# EAGLE board panelized_oshpark_femtoBeacon_r2.0.0 (EAGLE 7.5.0), part 1 of 3
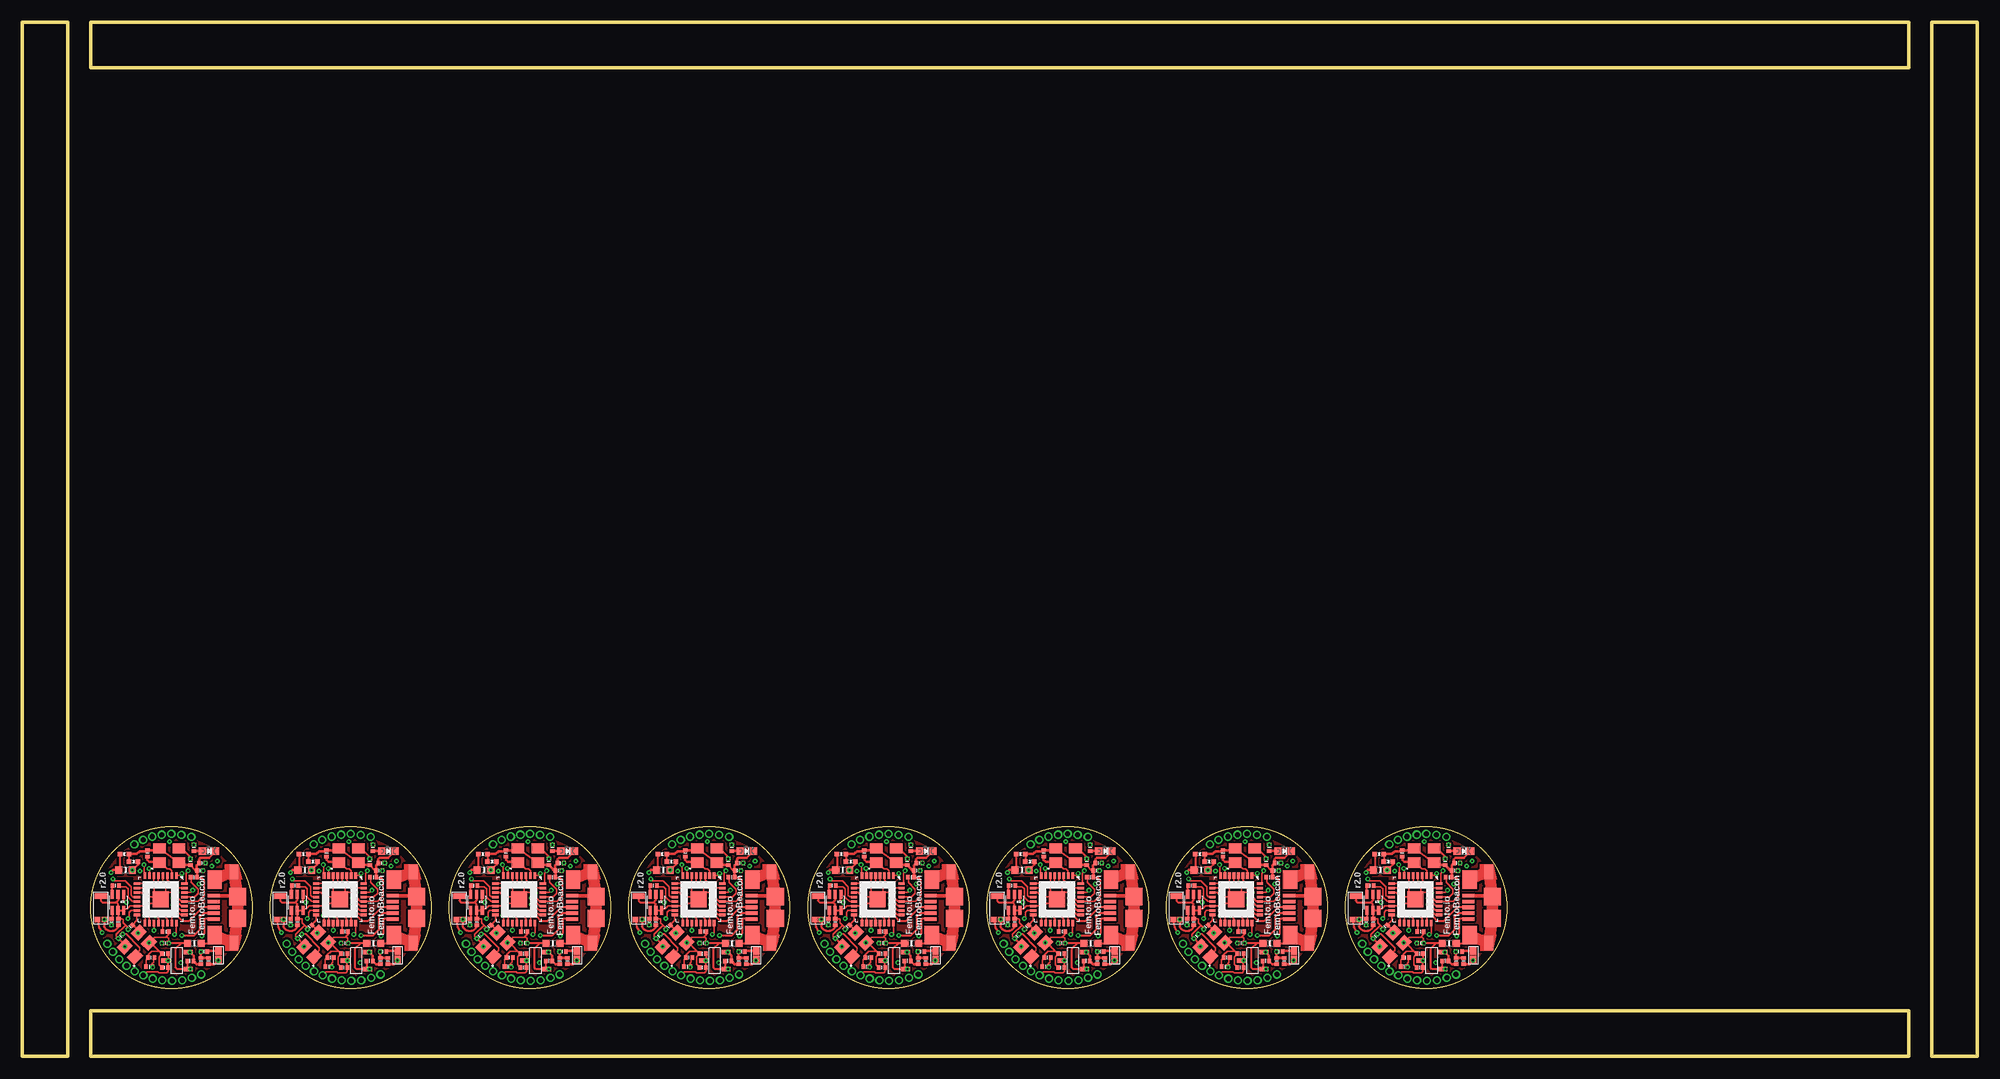
[diagram p0: board, top side]
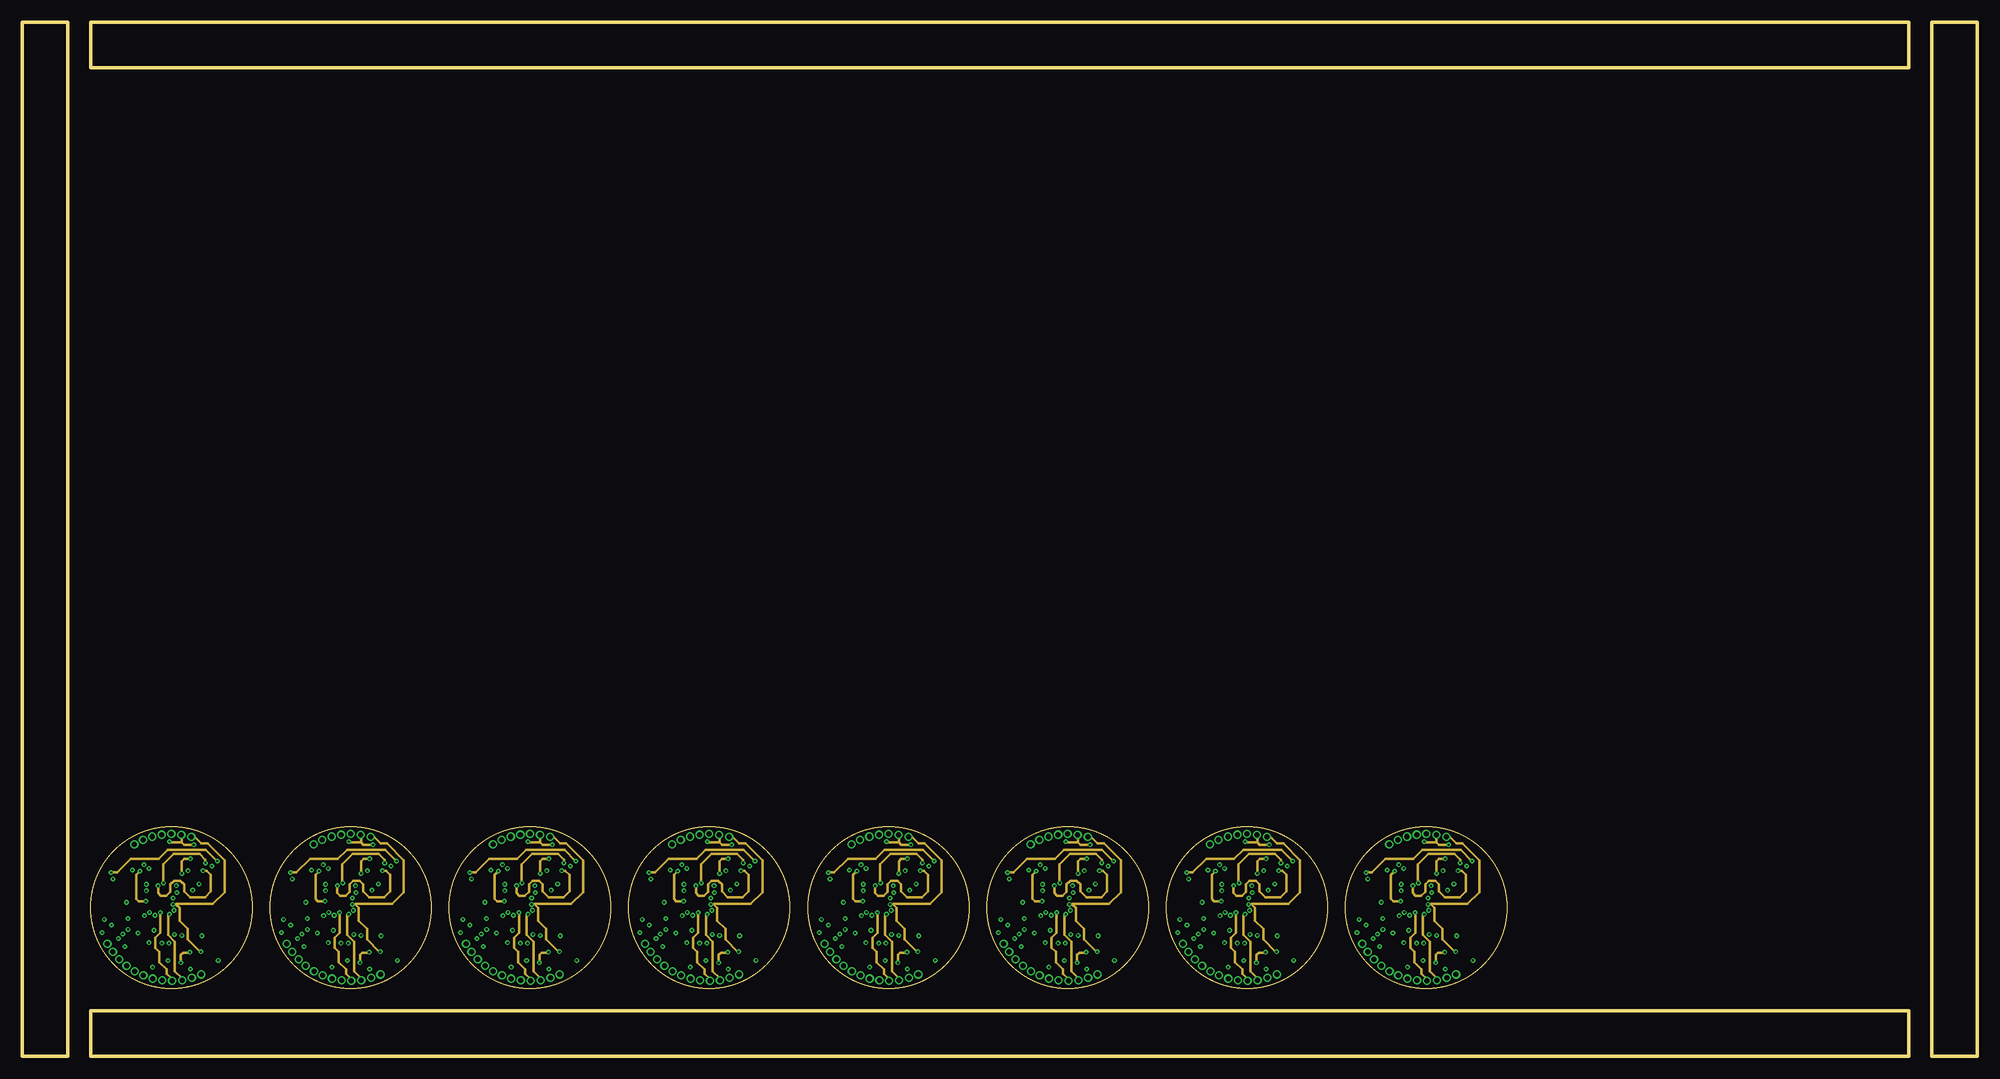
[diagram p1: board, inner layer Route2]
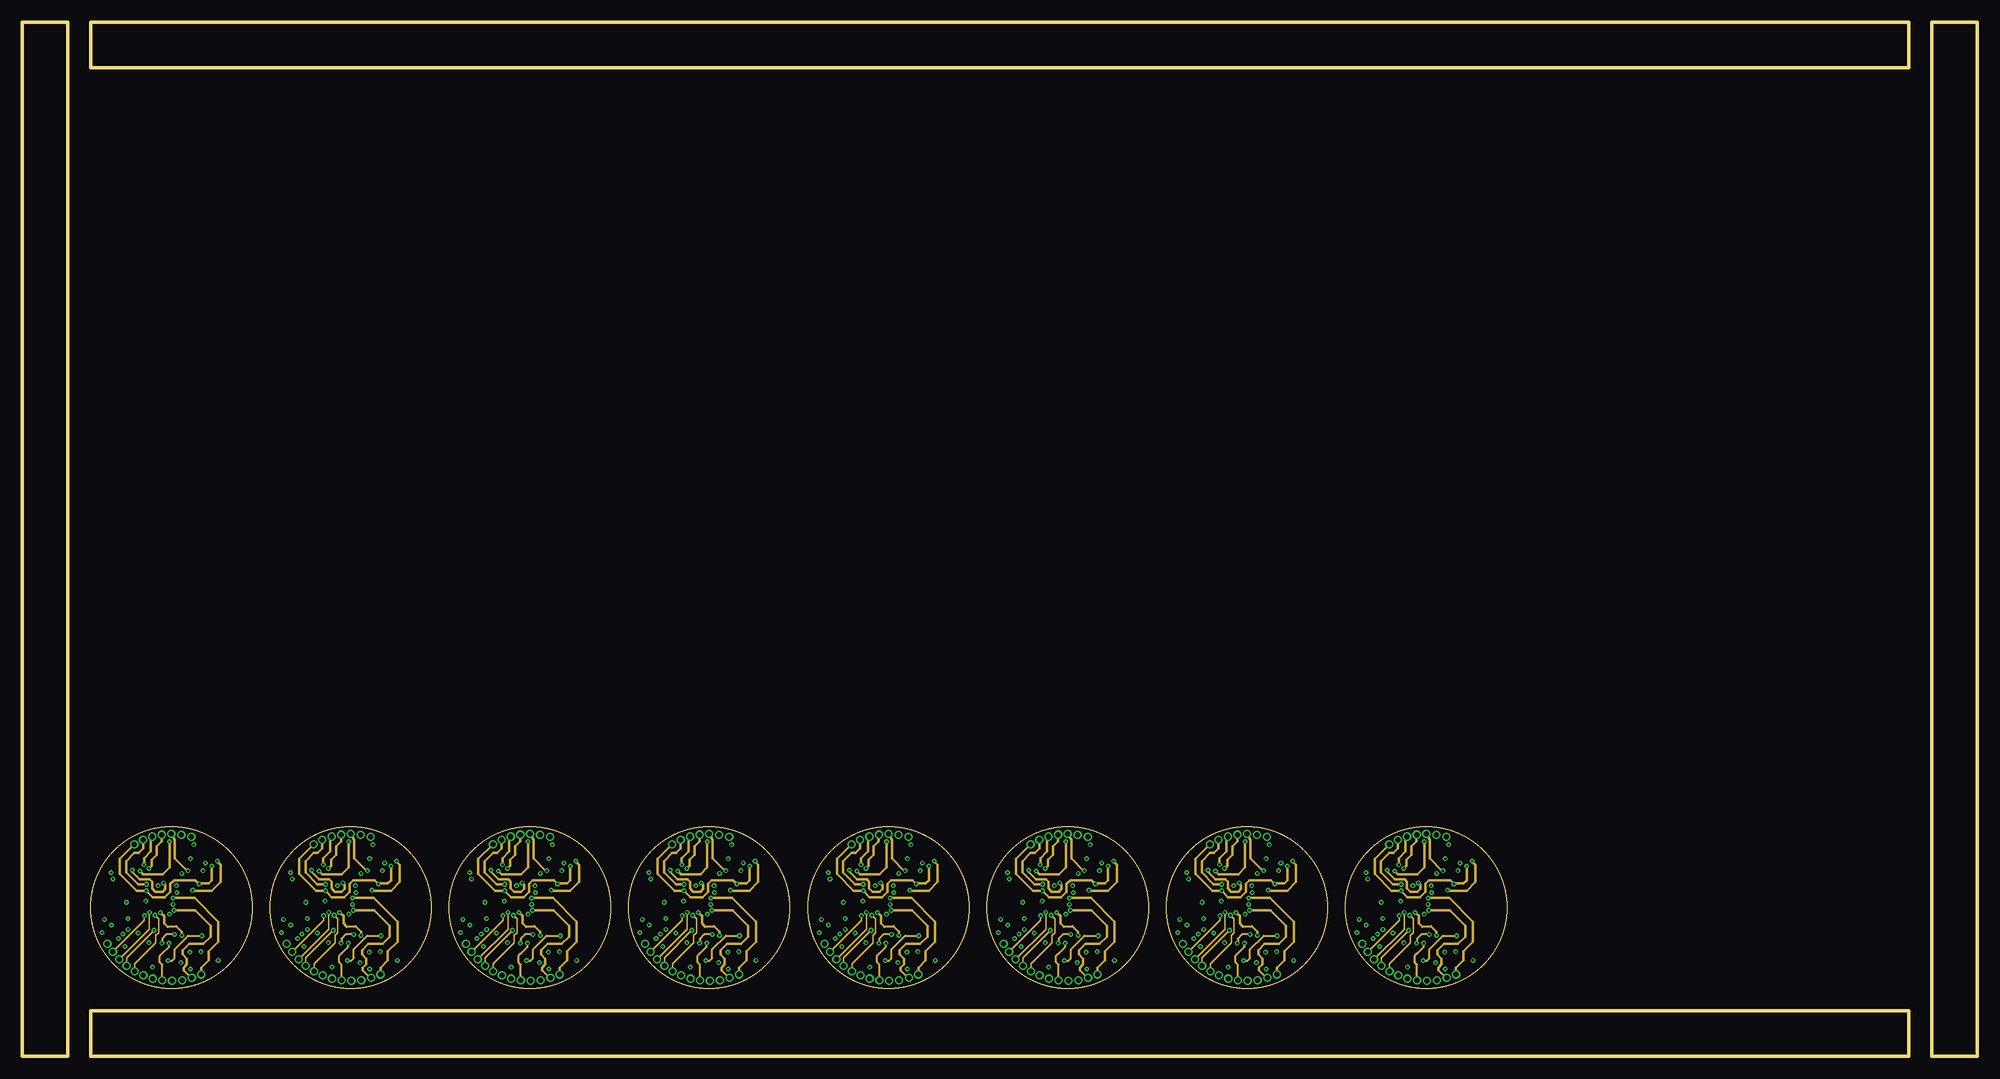
[diagram p2: board, inner layer Route15]
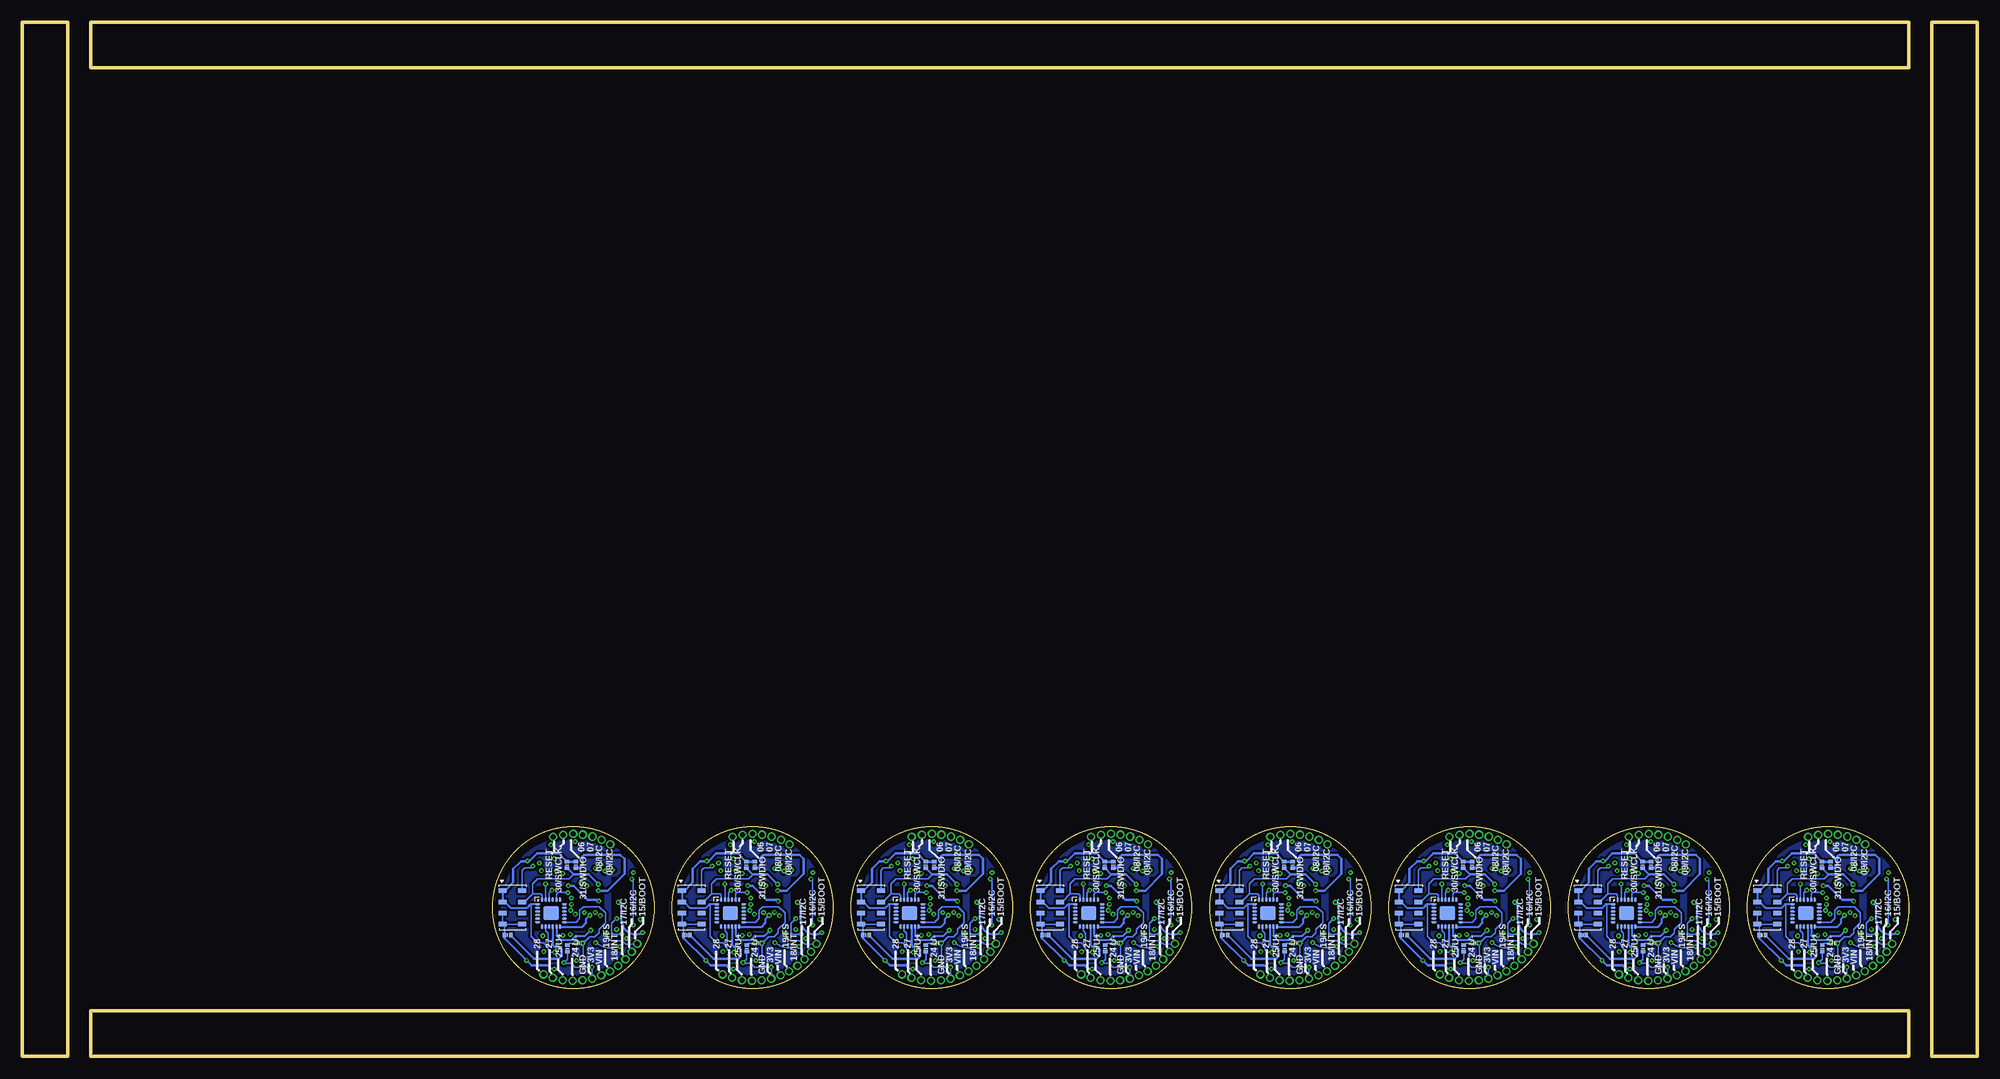
[diagram p3: board, bottom side, seen from below]

Size 218.08 x 115.39 mm. Coordinates in mm from the lower left corner, seen from the top.
Outline: 5.08,0 0,0 0,115.39 5.08,115.39 5.08,0
Outline: 7.62,5.08 7.62,0 210.46,0 210.46,5.08 7.62,5.08
Outline: 218.08,0 213,0 213,115.39 218.08,115.39 218.08,0
Outline: 7.62,115.39 7.62,110.31 210.46,110.31 210.46,115.39 7.62,115.39
Outline: circle at 16.62,16.62 radius 9
Outline: circle at 36.62,16.62 radius 9
Outline: circle at 56.62,16.62 radius 9
Outline: circle at 76.62,16.62 radius 9
Outline: circle at 96.62,16.62 radius 9
Outline: circle at 116.62,16.62 radius 9
Outline: circle at 136.62,16.62 radius 9
Outline: circle at 156.62,16.62 radius 9
Copper layers (1+2*15+16): Top 0.035mm / dielectric 0.7mm / Route2 0.035mm / dielectric 0.15mm / Route15 0.035mm / dielectric 0.2mm / Bottom 0.035mm
Design rules "AQS_custom_4layer": minimum track width 5mil, minimum drill 5mil, track to track 6mil, track to pad 6mil, pad to pad 6mil, via to via 6mil, smd to smd 1mil, copper to edge 15mil, drill to drill 6mil, minimum pad ring 7mil, minimum via ring 3mil, stop-mask expansion 2mil, vias tented up to drill 10mil, thermal gap 10mil

## Footprints (pad centres in the part's own frame; a part is rotated, then mirrored left to right if it is on the bottom)
ANT_BAR = smd 0.62 x 0.61: 1 -1.3,0.37; 2 -1.3,-0.38 | smd 0.62 x 1.36: 3 1.3,0
SPST_SMD = smd 0.889 x 0.699: 1 -0.508,0; 2 0.508,0
PART = smd 0.4 x 0.5: 1 -0.35,0; 2 0.35,0
_0402MP = smd 0.5 x 0.5: 1 -0.508,0; 2 0.508,0
_0603MP = smd 0.8 x 0.8: 1 -0.762,0; 2 0.762,0
MCP1700T-3302E/TT = smd 0.5 x 1: GND -0.95,-1.25; VIN 0,1.25; VOUT 0.95,-1.25
CHIPLED_0603_NOOUTLINE = smd 0.8 x 0.8: A 0,-0.75; C 0,0.75
TSX-3225 = smd 1.4 x 1.15: 1 -1.1,-0.8; 2 1.1,-0.8; 3 1.1,0.8; 4 -1.1,0.8
1X1_ROUND = drill 0.559 pad 0.864: P$1 0,0
QFN_3X3MM = smd 0.6 x 0.25: P$1 -1.5,1; P$2 -1.5,0.6; P$3 -1.5,0.2; P$4 -1.5,-0.2; P$5 -1.5,-0.6; P$6 -1.5,-1; P$13 1.5,-1; P$14 1.5,-0.6; P$15 1.5,-0.2; P$16 1.5,0.2; P$17 1.5,0.6; P$18 1.5,1 | smd 0.25 x 0.6: P$7 -1,-1.5; P$8 -0.6,-1.5; P$9 -0.2,-1.5; P$10 0.2,-1.5; P$11 0.6,-1.5; P$12 1,-1.5; P$19 1,1.5; P$20 0.6,1.5; P$21 0.2,1.5; P$22 -0.2,1.5; P$23 -0.6,1.5; P$24 -1,1.5 | smd 1.7 x 1.54: P$25 0,0
0805_BALUN = smd 1 x 0.35: 1 -0.9,0.65; 2 -0.9,0; 3 -0.9,-0.65; 4 0.9,-0.65; 5 0.9,0; 6 0.9,0.65
MS5611-01BA03 = smd 0.9 x 0.5: 1 -1.1,1.875; 2 -1.1,0.625; 3 -1.1,-0.625; 4 -1.1,-1.875; 5 1.1,-1.875; 6 1.1,-0.625; 7 1.1,0.625; 8 1.1,1.875
QFN32 = smd 0.7 x 0.3: 1 -2.65,1.75; 2 -2.65,1.25; 3 -2.65,0.75; 4 -2.65,0.25; 5 -2.65,-0.25; 6 -2.65,-0.75; 7 -2.65,-1.25; 8 -2.65,-1.75; 17 2.65,-1.75; 18 2.65,-1.25; 19 2.65,-0.75; 20 2.65,-0.25; 21 2.65,0.25; 22 2.65,0.75; 23 2.65,1.25; 24 2.65,1.75 | smd 0.3 x 0.7: 9 -1.75,-2.65; 10 -1.25,-2.65; 11 -0.75,-2.65; 12 -0.25,-2.65; 13 0.25,-2.65; 14 0.75,-2.65; 15 1.25,-2.65; 16 1.75,-2.65; 25 1.75,2.65; 26 1.25,2.65; 27 0.75,2.65; 28 0.25,2.65; 29 -0.25,2.65; 30 -0.75,2.65; 31 -1.25,2.65; 32 -1.75,2.65 | smd 1.8 x 1.8: 33 0,0
USB_MICROB_PACKAGE = smd 0.4 x 1.35: 1 -1.3,1.47; 2 -0.64,1.47; 3 0,1.47; 4 0.66,1.47; 5 1.3,1.47 | smd 2.1 x 1.6: 6 -3.1,1.35; 11 3.1,1.35 | smd 1.6 x 1: 7 -4,-0.8; 10 4,-0.8 | smd 1.9 x 1.9: 8 -1.2,-1.2; 9 1.2,-1.2

## Placement (x,y rotation side)
ANT1  PULSE_ANT_2.4GHZ  [ANT_BAR]  8.76,16.59 90 top
ANT2  PULSE_ANT_2.4GHZ  [ANT_BAR]  28.76,16.59 90 top
ANT3  PULSE_ANT_2.4GHZ  [ANT_BAR]  48.76,16.59 90 top
ANT4  PULSE_ANT_2.4GHZ  [ANT_BAR]  68.76,16.59 90 top
ANT5  PULSE_ANT_2.4GHZ  [ANT_BAR]  88.76,16.59 90 top
ANT6  PULSE_ANT_2.4GHZ  [ANT_BAR]  108.76,16.59 90 top
ANT7  PULSE_ANT_2.4GHZ  [ANT_BAR]  128.76,16.59 90 top
ANT8  PULSE_ANT_2.4GHZ  [ANT_BAR]  148.76,16.59 90 top
BTN  DNP  [SPST_SMD]  21.87,11.28 270 top
BTN1  DNP  [SPST_SMD]  41.87,11.28 270 top
BTN2  DNP  [SPST_SMD]  61.87,11.28 270 top
BTN3  DNP  [SPST_SMD]  81.87,11.28 270 top
BTN4  DNP  [SPST_SMD]  101.87,11.28 270 top
BTN5  DNP  [SPST_SMD]  121.87,11.28 270 top
BTN6  DNP  [SPST_SMD]  141.87,11.28 270 top
BTN7  DNP  [SPST_SMD]  161.87,11.28 270 top
C1  0.1uF  [PART]  20.78,10.64 270 top
C2  0.1uF  [PART]  15.98,13.94 0 top
C3  10pF  [PART]  10.95,13.41 45 top
C4  10pF  [PART]  12.04,14.43 225 top
C5  2.2uF  [PART]  18.75,10.67 180 top
C6  2.2uF  [PART]  15.9,11.45 180 top
C7  0.47uF  [PART]  15.9,9.93 180 top
C8  0.1uF  [PART]  20.07,21.59 180 top
C9  0.1uF  [PART]  19.13,19.99 0 top
C10  0.1uF  [PART]  14.38,11.02 180 top
C11  22pF, C0G, 5%  [PART]  10.41,19.05 180 top
C12  22pF, C0G, 5%  [PART]  9.93,15.01 90 top
C13  DNP  [PART]  10.69,15.01 90 top
C14  9pF  [PART]  13.94,22.66 270 top
C15  9pF  [PART]  18.75,21.72 270 top
C16  0.1uF  [PART]  15.95,12.64 0 top
C17  0.1uF  [PART]  19.81,20.73 180 top
C18  0.1uF  [PART]  40.78,10.64 270 top
C19  0.1uF  [PART]  35.98,13.94 0 top
C20  2.2uF  [PART]  38.75,10.67 180 top
C21  10uF  [_0402MP]  11.38,22.58 180 top
C22  10uF  [_0402MP]  12.4,21.74 0 top
C23  2.2uF  [PART]  35.9,11.45 180 top
C24  0.47uF  [PART]  35.9,9.93 180 top
C25  0.1uF  [PART]  37.27,12.07 90 bottom
C26  0.1uF  [PART]  40.07,21.59 180 top
C27  0.1uF  [PART]  39.13,19.99 0 top
C28  0.1uF  [PART]  35.95,12.64 0 top
C29  0.1uF  [PART]  17.27,12.07 90 bottom
C30  0.1uF  [PART]  15.95,12.64 0 bottom
C31  10nF  [PART]  14.15,10.01 0 top
C32  0.1uF  [PART]  23.95,13.54 180 bottom
C33  0.1uF  [PART]  39.81,20.73 180 top
C34  10uF  [_0402MP]  31.38,22.58 180 top
C35  10uF  [_0402MP]  32.4,21.74 0 top
C36  0.1uF  [PART]  34.38,11.02 180 top
C37  10pF  [PART]  30.95,13.41 45 top
C38  10pF  [PART]  32.04,14.43 225 top
C39  22pF, C0G, 5%  [PART]  30.41,19.05 180 top
C40  22pF, C0G, 5%  [PART]  29.93,15.01 90 top
C41  DNP  [PART]  30.69,15.01 90 top
C42  9pF  [PART]  33.94,22.66 270 top
C43  9pF  [PART]  38.75,21.72 270 top
C44  10nF  [PART]  34.15,10.01 0 top
C45  0.1uF  [PART]  35.95,12.64 0 bottom
C46  0.1uF  [PART]  43.95,13.54 180 bottom
C47  0.1uF  [PART]  60.78,10.64 270 top
C48  0.1uF  [PART]  55.98,13.94 0 top
C49  2.2uF  [PART]  58.75,10.67 180 top
C50  2.2uF  [PART]  55.9,11.45 180 top
C51  0.47uF  [PART]  55.9,9.93 180 top
C52  0.1uF  [PART]  57.27,12.07 90 bottom
C53  0.1uF  [PART]  60.07,21.59 180 top
C54  0.1uF  [PART]  59.13,19.99 0 top
C55  0.1uF  [PART]  55.95,12.64 0 top
C56  0.1uF  [PART]  59.81,20.73 180 top
C57  10uF  [_0402MP]  51.38,22.58 180 top
C58  10uF  [_0402MP]  52.4,21.74 0 top
C59  0.1uF  [PART]  54.38,11.02 180 top
C60  10pF  [PART]  50.95,13.41 45 top
C61  10pF  [PART]  52.04,14.43 225 top
C62  22pF, C0G, 5%  [PART]  50.41,19.05 180 top
C63  22pF, C0G, 5%  [PART]  49.93,15.01 90 top
C64  DNP  [PART]  50.69,15.01 90 top
C65  9pF  [PART]  53.94,22.66 270 top
C66  9pF  [PART]  58.75,21.72 270 top
C67  10nF  [PART]  54.15,10.01 0 top
C68  0.1uF  [PART]  55.95,12.64 0 bottom
C69  0.1uF  [PART]  63.95,13.54 180 bottom
C70  0.1uF  [PART]  80.78,10.64 270 top
C71  0.1uF  [PART]  75.98,13.94 0 top
C72  2.2uF  [PART]  78.75,10.67 180 top
C73  2.2uF  [PART]  75.9,11.45 180 top
C74  0.47uF  [PART]  75.9,9.93 180 top
C75  0.1uF  [PART]  77.27,12.07 90 bottom
C76  0.1uF  [PART]  80.07,21.59 180 top
C77  0.1uF  [PART]  79.13,19.99 0 top
C78  0.1uF  [PART]  75.95,12.64 0 top
C79  0.1uF  [PART]  79.81,20.73 180 top
C80  10uF  [_0402MP]  71.38,22.58 180 top
C81  10uF  [_0402MP]  72.4,21.74 0 top
C82  0.1uF  [PART]  74.38,11.02 180 top
C83  10pF  [PART]  70.95,13.41 45 top
C84  10pF  [PART]  72.04,14.43 225 top
C85  22pF, C0G, 5%  [PART]  70.41,19.05 180 top
C86  22pF, C0G, 5%  [PART]  69.93,15.01 90 top
C87  DNP  [PART]  70.69,15.01 90 top
C88  9pF  [PART]  73.94,22.66 270 top
C89  9pF  [PART]  78.75,21.72 270 top
C90  10nF  [PART]  74.15,10.01 0 top
C91  0.1uF  [PART]  75.95,12.64 0 bottom
C92  0.1uF  [PART]  83.95,13.54 180 bottom
C93  0.1uF  [PART]  100.78,10.64 270 top
C94  0.1uF  [PART]  95.98,13.94 0 top
C95  2.2uF  [PART]  98.75,10.67 180 top
C96  2.2uF  [PART]  95.9,11.45 180 top
C97  0.47uF  [PART]  95.9,9.93 180 top
C98  0.1uF  [PART]  97.27,12.07 90 bottom
C99  0.1uF  [PART]  100.07,21.59 180 top
C100  0.1uF  [PART]  99.13,19.99 0 top
C101  0.1uF  [PART]  95.95,12.64 0 top
C102  0.1uF  [PART]  99.81,20.73 180 top
C103  10uF  [_0402MP]  91.38,22.58 180 top
C104  10uF  [_0402MP]  92.4,21.74 0 top
C105  0.1uF  [PART]  94.38,11.02 180 top
C106  10pF  [PART]  90.95,13.41 45 top
C107  10pF  [PART]  92.04,14.43 225 top
C108  22pF, C0G, 5%  [PART]  90.41,19.05 180 top
C109  22pF, C0G, 5%  [PART]  89.93,15.01 90 top
C110  DNP  [PART]  90.69,15.01 90 top
C111  9pF  [PART]  93.94,22.66 270 top
C112  9pF  [PART]  98.75,21.72 270 top
C113  10nF  [PART]  94.15,10.01 0 top
C114  0.1uF  [PART]  95.95,12.64 0 bottom
C115  0.1uF  [PART]  103.95,13.54 180 bottom
C116  0.1uF  [PART]  120.78,10.64 270 top
C117  0.1uF  [PART]  115.98,13.94 0 top
C118  2.2uF  [PART]  118.75,10.67 180 top
C119  2.2uF  [PART]  115.9,11.45 180 top
C120  0.47uF  [PART]  115.9,9.93 180 top
C121  0.1uF  [PART]  117.27,12.07 90 bottom
C122  0.1uF  [PART]  120.07,21.59 180 top
C123  0.1uF  [PART]  119.13,19.99 0 top
C124  0.1uF  [PART]  115.95,12.64 0 top
C125  0.1uF  [PART]  119.81,20.73 180 top
C126  10uF  [_0402MP]  111.38,22.58 180 top
C127  10uF  [_0402MP]  112.4,21.74 0 top
C128  0.1uF  [PART]  114.38,11.02 180 top
C129  10pF  [PART]  110.95,13.41 45 top
C130  10pF  [PART]  112.04,14.43 225 top
C131  22pF, C0G, 5%  [PART]  110.41,19.05 180 top
C132  22pF, C0G, 5%  [PART]  109.93,15.01 90 top
C133  DNP  [PART]  110.69,15.01 90 top
C134  9pF  [PART]  113.94,22.66 270 top
C135  9pF  [PART]  118.75,21.72 270 top
C136  10nF  [PART]  114.15,10.01 0 top
C137  0.1uF  [PART]  115.95,12.64 0 bottom
C138  0.1uF  [PART]  123.95,13.54 180 bottom
C139  0.1uF  [PART]  140.78,10.64 270 top
C140  0.1uF  [PART]  135.98,13.94 0 top
C141  2.2uF  [PART]  138.75,10.67 180 top
C142  2.2uF  [PART]  135.9,11.45 180 top
C143  0.47uF  [PART]  135.9,9.93 180 top
C144  0.1uF  [PART]  137.27,12.07 90 bottom
C145  0.1uF  [PART]  140.07,21.59 180 top
C146  0.1uF  [PART]  139.13,19.99 0 top
C147  0.1uF  [PART]  135.95,12.64 0 top
C148  0.1uF  [PART]  139.81,20.73 180 top
C149  10uF  [_0402MP]  131.38,22.58 180 top
C150  10uF  [_0402MP]  132.4,21.74 0 top
C151  0.1uF  [PART]  134.38,11.02 180 top
C152  10pF  [PART]  130.95,13.41 45 top
C153  10pF  [PART]  132.04,14.43 225 top
C154  22pF, C0G, 5%  [PART]  130.41,19.05 180 top
C155  22pF, C0G, 5%  [PART]  129.93,15.01 90 top
C156  DNP  [PART]  130.69,15.01 90 top
C157  9pF  [PART]  133.94,22.66 270 top
C158  9pF  [PART]  138.75,21.72 270 top
C159  10nF  [PART]  134.15,10.01 0 top
C160  0.1uF  [PART]  135.95,12.64 0 bottom
C161  0.1uF  [PART]  143.95,13.54 180 bottom
C162  0.1uF  [PART]  160.78,10.64 270 top
C163  0.1uF  [PART]  155.98,13.94 0 top
C164  2.2uF  [PART]  158.75,10.67 180 top
C165  2.2uF  [PART]  155.9,11.45 180 top
C166  0.47uF  [PART]  155.9,9.93 180 top
C167  0.1uF  [PART]  157.27,12.07 90 bottom
C168  0.1uF  [PART]  160.07,21.59 180 top
C169  0.1uF  [PART]  159.13,19.99 0 top
C170  0.1uF  [PART]  155.95,12.64 0 top
C171  0.1uF  [PART]  159.81,20.73 180 top
C172  10uF  [_0402MP]  151.38,22.58 180 top
C173  10uF  [_0402MP]  152.4,21.74 0 top
C174  0.1uF  [PART]  154.38,11.02 180 top
C175  10pF  [PART]  150.95,13.41 45 top
C176  10pF  [PART]  152.04,14.43 225 top
C177  22pF, C0G, 5%  [PART]  150.41,19.05 180 top
C178  22pF, C0G, 5%  [PART]  149.93,15.01 90 top
C179  DNP  [PART]  150.69,15.01 90 top
C180  9pF  [PART]  153.94,22.66 270 top
C181  9pF  [PART]  158.75,21.72 270 top
C182  10nF  [PART]  154.15,10.01 0 top
C183  0.1uF  [PART]  155.95,12.64 0 bottom
C184  0.1uF  [PART]  163.95,13.54 180 bottom
FB1  [_0603MP]  19.2,12.62 180 top
FB2  [_0603MP]  39.2,12.62 180 top
FB3  [_0603MP]  59.2,12.62 180 top
FB4  [_0603MP]  79.2,12.62 180 top
FB5  [_0603MP]  99.2,12.62 180 top
FB6  [_0603MP]  119.2,12.62 180 top
FB7  [_0603MP]  139.2,12.62 180 top
FB8  [_0603MP]  159.2,12.62 180 top
L1  10uH  [_0603MP]  31.51,20.8 0 top
L2  10uH  [_0603MP]  51.51,20.8 0 top
L3  10uH  [_0603MP]  71.51,20.8 0 top
L4  10uH  [_0603MP]  91.51,20.8 0 top
L5  10uH  [_0603MP]  111.51,20.8 0 top
L6  10uH  [_0603MP]  11.51,20.8 0 top
L7  10uH  [_0603MP]  131.51,20.8 0 top
L8  10uH  [_0603MP]  151.51,20.8 0 top
LDO_VREG  MCP1700T-3302E/TT  [MCP1700T-3302E/TT]  17.26,10.69 90 top
LDO_VREG1  MCP1700T-3302E/TT  [MCP1700T-3302E/TT]  37.26,10.69 90 top
LDO_VREG2  MCP1700T-3302E/TT  [MCP1700T-3302E/TT]  57.26,10.69 90 top
LDO_VREG3  MCP1700T-3302E/TT  [MCP1700T-3302E/TT]  77.26,10.69 90 top
LDO_VREG4  MCP1700T-3302E/TT  [MCP1700T-3302E/TT]  97.26,10.69 90 top
LDO_VREG5  MCP1700T-3302E/TT  [MCP1700T-3302E/TT]  117.26,10.69 90 top
LDO_VREG6  MCP1700T-3302E/TT  [MCP1700T-3302E/TT]  137.26,10.69 90 top
LDO_VREG7  MCP1700T-3302E/TT  [MCP1700T-3302E/TT]  157.26,10.69 90 top
LED1  BLUE  [CHIPLED_0603_NOOUTLINE]  40.83,22.91 270 top
LED2  BLUE  [CHIPLED_0603_NOOUTLINE]  20.83,22.91 270 top
LED3  BLUE  [CHIPLED_0603_NOOUTLINE]  60.83,22.91 270 top
LED4  BLUE  [CHIPLED_0603_NOOUTLINE]  80.83,22.91 270 top
LED5  BLUE  [CHIPLED_0603_NOOUTLINE]  100.83,22.91 270 top
LED6  BLUE  [CHIPLED_0603_NOOUTLINE]  120.83,22.91 270 top
LED7  BLUE  [CHIPLED_0603_NOOUTLINE]  140.83,22.91 270 top
LED8  BLUE  [CHIPLED_0603_NOOUTLINE]  160.83,22.91 270 top
R1  330  [PART]  20.27,11.68 180 top
R2  10K  [PART]  19.94,10.64 270 top
R3  330  [PART]  40.27,11.68 180 top
R4  330  [PART]  19.13,23.27 270 top
R5  10K  [PART]  39.94,10.64 270 top
R6  330  [PART]  39.13,23.27 270 top
R7  2.2K  [PART]  37.32,21.39 90 bottom
R8  2.2K  [PART]  17.32,21.39 90 bottom
R9  2.2K  [PART]  16.36,21.39 90 bottom
R10  2.2K  [PART]  36.36,21.39 90 bottom
R11  330  [PART]  60.27,11.68 180 top
R12  10K  [PART]  59.94,10.64 270 top
R13  330  [PART]  59.13,23.27 270 top
R14  2.2K  [PART]  57.32,21.39 90 bottom
R15  2.2K  [PART]  56.36,21.39 90 bottom
R16  330  [PART]  80.27,11.68 180 top
R17  10K  [PART]  79.94,10.64 270 top
R18  330  [PART]  79.13,23.27 270 top
R19  2.2K  [PART]  77.32,21.39 90 bottom
R20  2.2K  [PART]  76.36,21.39 90 bottom
R21  330  [PART]  100.27,11.68 180 top
R22  10K  [PART]  99.94,10.64 270 top
R23  330  [PART]  99.13,23.27 270 top
R24  2.2K  [PART]  97.32,21.39 90 bottom
R25  2.2K  [PART]  96.36,21.39 90 bottom
R26  330  [PART]  120.27,11.68 180 top
R27  10K  [PART]  119.94,10.64 270 top
R28  330  [PART]  119.13,23.27 270 top
R29  2.2K  [PART]  117.32,21.39 90 bottom
R30  2.2K  [PART]  116.36,21.39 90 bottom
R31  330  [PART]  140.27,11.68 180 top
R32  10K  [PART]  139.94,10.64 270 top
R33  330  [PART]  139.13,23.27 270 top
R34  2.2K  [PART]  137.32,21.39 90 bottom
R35  2.2K  [PART]  136.36,21.39 90 bottom
R36  330  [PART]  160.27,11.68 180 top
R37  10K  [PART]  159.94,10.64 270 top
R38  330  [PART]  159.13,23.27 270 top
R39  2.2K  [PART]  157.32,21.39 90 bottom
R40  2.2K  [PART]  156.36,21.39 90 bottom
SER3628CT-ND  16MHz  [TSX-3225]  16.39,22.42 0 top
SER3628CT-ND1  16MHz  [TSX-3225]  36.39,22.42 0 top
SER3628CT-ND2  16MHz  [TSX-3225]  56.39,22.42 0 top
SER3628CT-ND3  16MHz  [TSX-3225]  76.39,22.42 0 top
SER3628CT-ND4  16MHz  [TSX-3225]  96.39,22.42 0 top
SER3628CT-ND5  16MHz  [TSX-3225]  116.39,22.42 0 top
SER3628CT-ND6  16MHz  [TSX-3225]  136.39,22.42 0 top
SER3628CT-ND7  16MHz  [TSX-3225]  156.39,22.42 0 top
TSX-3225_CRYSTAL  48MHz  [TSX-3225]  12.78,12.47 45 top
TSX-3225_CRYSTAL1  48MHz  [TSX-3225]  32.78,12.47 45 top
TSX-3225_CRYSTAL2  48MHz  [TSX-3225]  52.78,12.47 45 top
TSX-3225_CRYSTAL3  48MHz  [TSX-3225]  72.78,12.47 45 top
TSX-3225_CRYSTAL4  48MHz  [TSX-3225]  92.78,12.47 45 top
TSX-3225_CRYSTAL5  48MHz  [TSX-3225]  112.78,12.47 45 top
TSX-3225_CRYSTAL6  48MHz  [TSX-3225]  132.78,12.47 45 top
TSX-3225_CRYSTAL7  48MHz  [TSX-3225]  152.78,12.47 45 top
U$1  1X1_ROUND  [1X1_ROUND]  13.5,9.05 0 top
U$2  1X1_ROUND  [1X1_ROUND]  15.6,8.49 0 top
U$3  1X1_ROUND  [1X1_ROUND]  33.5,9.05 0 top
U$4  1X1_ROUND  [1X1_ROUND]  35.6,8.49 0 top
U$5  1X1_ROUND  [1X1_ROUND]  14.54,8.69 0 top
U$6  MPU-9250  [QFN_3X3MM]  19.11,15.98 0 bottom
U$7  1X1_ROUND  [1X1_ROUND]  18.91,8.77 0 top
U$8  1X1_ROUND  [1X1_ROUND]  34.54,8.69 0 top
U$9  1X1_ROUND  [1X1_ROUND]  16.7,8.43 0 top
U$10  1X1_ROUND  [1X1_ROUND]  17.81,8.51 0 top
U$11  1X1_ROUND  [1X1_ROUND]  32.53,9.52 0 top
U$12  JOHANSON_2450BM15A0015E  [0805_BALUN]  10.67,17.2 270 top
U$13  1X1_ROUND  [1X1_ROUND]  31.62,10.12 0 top
U$14  1X1_ROUND  [1X1_ROUND]  30.81,10.83 0 top
U$15  1X1_ROUND  [1X1_ROUND]  30.1,11.67 0 top
U$16  1X1_ROUND  [1X1_ROUND]  29.49,12.58 0 top
U$17  1X1_ROUND  [1X1_ROUND]  32.49,23.68 0 top
U$18  1X1_ROUND  [1X1_ROUND]  33.46,24.18 0 top
U$19  1X1_ROUND  [1X1_ROUND]  34.49,24.53 0 top
U$20  1X1_ROUND  [1X1_ROUND]  38.86,24.5 0 top
U$21  1X1_ROUND  [1X1_ROUND]  37.74,24.72 0 top
U$22  1X1_ROUND  [1X1_ROUND]  36.62,24.82 0 top
U$23  1X1_ROUND  [1X1_ROUND]  38.91,8.77 0 top
U$24  1X1_ROUND  [1X1_ROUND]  39.95,9.14 0 top
U$25  1X1_ROUND  [1X1_ROUND]  35.56,24.75 0 top
U$26  1X1_ROUND  [1X1_ROUND]  36.7,8.43 0 top
U$27  1X1_ROUND  [1X1_ROUND]  37.81,8.51 0 top
U$28  MS5611-01BA03  [MS5611-01BA03]  43.41,16.63 0 bottom
U$29  ATSAMR21E18A-MUT  [QFN32]  35.43,17.54 270 top
U$30  JOHANSON_2450BM15A0015E  [0805_BALUN]  30.67,17.2 270 top
U$31  MPU-9250  [QFN_3X3MM]  39.11,15.98 0 bottom
U$32  1X1_ROUND  [1X1_ROUND]  53.5,9.05 0 top
U$33  1X1_ROUND  [1X1_ROUND]  55.6,8.49 0 top
U$34  1X1_ROUND  [1X1_ROUND]  54.54,8.69 0 top
U$35  1X1_ROUND  [1X1_ROUND]  12.53,9.52 0 top
U$36  1X1_ROUND  [1X1_ROUND]  11.62,10.12 0 top
U$37  1X1_ROUND  [1X1_ROUND]  10.81,10.83 0 top
U$38  1X1_ROUND  [1X1_ROUND]  10.1,11.67 0 top
U$39  1X1_ROUND  [1X1_ROUND]  9.49,12.58 0 top
U$40  1X1_ROUND  [1X1_ROUND]  52.53,9.52 0 top
U$41  1X1_ROUND  [1X1_ROUND]  12.5,23.68 0 top
U$42  1X1_ROUND  [1X1_ROUND]  13.46,24.18 0 top
U$43  1X1_ROUND  [1X1_ROUND]  14.49,24.53 0 top
U$44  MS5611-01BA03  [MS5611-01BA03]  23.41,16.63 0 bottom
U$45  1X1_ROUND  [1X1_ROUND]  18.86,24.5 0 top
U$46  1X1_ROUND  [1X1_ROUND]  17.74,24.72 0 top
U$47  1X1_ROUND  [1X1_ROUND]  16.62,24.82 0 top
U$48  1X1_ROUND  [1X1_ROUND]  19.95,9.14 0 top
U$49  1X1_ROUND  [1X1_ROUND]  51.62,10.12 0 top
U$50  1X1_ROUND  [1X1_ROUND]  50.81,10.83 0 top
U$51  1X1_ROUND  [1X1_ROUND]  50.1,11.67 0 top
U$52  1X1_ROUND  [1X1_ROUND]  49.49,12.58 0 top
U$53  1X1_ROUND  [1X1_ROUND]  52.49,23.68 0 top
U$54  1X1_ROUND  [1X1_ROUND]  15.56,24.75 0 top
U$55  1X1_ROUND  [1X1_ROUND]  53.46,24.18 0 top
U$56  1X1_ROUND  [1X1_ROUND]  54.49,24.53 0 top
U$57  1X1_ROUND  [1X1_ROUND]  58.86,24.5 0 top
U$58  1X1_ROUND  [1X1_ROUND]  57.74,24.72 0 top
U$59  1X1_ROUND  [1X1_ROUND]  56.62,24.82 0 top
U$60  1X1_ROUND  [1X1_ROUND]  58.91,8.77 0 top
U$61  1X1_ROUND  [1X1_ROUND]  59.95,9.14 0 top
U$62  1X1_ROUND  [1X1_ROUND]  55.56,24.75 0 top
U$63  1X1_ROUND  [1X1_ROUND]  56.7,8.43 0 top
U$64  1X1_ROUND  [1X1_ROUND]  57.81,8.51 0 top
U$65  MS5611-01BA03  [MS5611-01BA03]  63.41,16.63 0 bottom
U$66  ATSAMR21E18A-MUT  [QFN32]  55.43,17.54 270 top
U$67  JOHANSON_2450BM15A0015E  [0805_BALUN]  50.67,17.2 270 top
U$68  MPU-9250  [QFN_3X3MM]  59.11,15.98 0 bottom
U$69  1X1_ROUND  [1X1_ROUND]  73.5,9.05 0 top
U$70  1X1_ROUND  [1X1_ROUND]  75.6,8.49 0 top
U$71  1X1_ROUND  [1X1_ROUND]  74.54,8.69 0 top
U$72  1X1_ROUND  [1X1_ROUND]  72.53,9.52 0 top
U$73  1X1_ROUND  [1X1_ROUND]  71.62,10.12 0 top
U$74  1X1_ROUND  [1X1_ROUND]  70.81,10.83 0 top
U$75  1X1_ROUND  [1X1_ROUND]  70.1,11.67 0 top
U$76  ATSAMR21E18A-MUT  [QFN32]  15.43,17.54 270 top
U$77  1X1_ROUND  [1X1_ROUND]  69.49,12.58 0 top
U$78  1X1_ROUND  [1X1_ROUND]  72.5,23.68 0 top
U$79  1X1_ROUND  [1X1_ROUND]  73.46,24.18 0 top
U$80  1X1_ROUND  [1X1_ROUND]  74.49,24.53 0 top
U$81  1X1_ROUND  [1X1_ROUND]  78.86,24.5 0 top
U$82  1X1_ROUND  [1X1_ROUND]  77.74,24.72 0 top
U$83  1X1_ROUND  [1X1_ROUND]  76.62,24.82 0 top
U$84  1X1_ROUND  [1X1_ROUND]  78.91,8.77 0 top
U$85  1X1_ROUND  [1X1_ROUND]  79.95,9.14 0 top
U$86  1X1_ROUND  [1X1_ROUND]  75.56,24.75 0 top
U$87  1X1_ROUND  [1X1_ROUND]  76.7,8.43 0 top
U$88  1X1_ROUND  [1X1_ROUND]  77.81,8.51 0 top
U$89  MS5611-01BA03  [MS5611-01BA03]  83.41,16.63 0 bottom
U$90  ATSAMR21E18A-MUT  [QFN32]  75.43,17.54 270 top
U$91  JOHANSON_2450BM15A0015E  [0805_BALUN]  70.67,17.2 270 top
U$92  MPU-9250  [QFN_3X3MM]  79.11,15.98 0 bottom
U$93  1X1_ROUND  [1X1_ROUND]  93.5,9.05 0 top
U$94  1X1_ROUND  [1X1_ROUND]  95.6,8.49 0 top
U$95  1X1_ROUND  [1X1_ROUND]  94.54,8.69 0 top
U$96  1X1_ROUND  [1X1_ROUND]  92.53,9.52 0 top
U$97  1X1_ROUND  [1X1_ROUND]  91.62,10.12 0 top
U$98  1X1_ROUND  [1X1_ROUND]  90.81,10.83 0 top
U$99  1X1_ROUND  [1X1_ROUND]  90.1,11.67 0 top
U$100  1X1_ROUND  [1X1_ROUND]  89.49,12.58 0 top
U$101  1X1_ROUND  [1X1_ROUND]  92.5,23.68 0 top
U$102  1X1_ROUND  [1X1_ROUND]  93.46,24.18 0 top
U$103  1X1_ROUND  [1X1_ROUND]  94.49,24.53 0 top
U$104  1X1_ROUND  [1X1_ROUND]  98.86,24.5 0 top
U$105  1X1_ROUND  [1X1_ROUND]  97.74,24.72 0 top
U$106  1X1_ROUND  [1X1_ROUND]  96.62,24.82 0 top
U$107  1X1_ROUND  [1X1_ROUND]  98.91,8.77 0 top
U$108  1X1_ROUND  [1X1_ROUND]  99.95,9.14 0 top
U$109  1X1_ROUND  [1X1_ROUND]  95.56,24.75 0 top
U$110  1X1_ROUND  [1X1_ROUND]  96.7,8.43 0 top
U$111  1X1_ROUND  [1X1_ROUND]  97.81,8.51 0 top
U$112  MS5611-01BA03  [MS5611-01BA03]  103.41,16.63 0 bottom
U$113  ATSAMR21E18A-MUT  [QFN32]  95.43,17.54 270 top
U$114  JOHANSON_2450BM15A0015E  [0805_BALUN]  90.67,17.2 270 top
U$115  MPU-9250  [QFN_3X3MM]  99.11,15.98 0 bottom
U$116  1X1_ROUND  [1X1_ROUND]  113.5,9.05 0 top
U$117  1X1_ROUND  [1X1_ROUND]  115.6,8.49 0 top
U$118  1X1_ROUND  [1X1_ROUND]  114.54,8.69 0 top
U$119  1X1_ROUND  [1X1_ROUND]  112.53,9.52 0 top
U$120  1X1_ROUND  [1X1_ROUND]  111.62,10.12 0 top
U$121  1X1_ROUND  [1X1_ROUND]  110.81,10.83 0 top
U$122  1X1_ROUND  [1X1_ROUND]  110.1,11.67 0 top
U$123  1X1_ROUND  [1X1_ROUND]  109.49,12.58 0 top
U$124  1X1_ROUND  [1X1_ROUND]  112.5,23.68 0 top
U$125  1X1_ROUND  [1X1_ROUND]  113.46,24.18 0 top
U$126  1X1_ROUND  [1X1_ROUND]  114.49,24.53 0 top
U$127  1X1_ROUND  [1X1_ROUND]  118.86,24.5 0 top
U$128  1X1_ROUND  [1X1_ROUND]  117.74,24.72 0 top
U$129  1X1_ROUND  [1X1_ROUND]  116.62,24.82 0 top
U$130  1X1_ROUND  [1X1_ROUND]  118.91,8.77 0 top
U$131  1X1_ROUND  [1X1_ROUND]  119.95,9.14 0 top
U$132  1X1_ROUND  [1X1_ROUND]  115.56,24.75 0 top
U$133  1X1_ROUND  [1X1_ROUND]  116.7,8.43 0 top
U$134  1X1_ROUND  [1X1_ROUND]  117.81,8.51 0 top
U$135  MS5611-01BA03  [MS5611-01BA03]  123.41,16.63 0 bottom
U$136  ATSAMR21E18A-MUT  [QFN32]  115.43,17.54 270 top
U$137  JOHANSON_2450BM15A0015E  [0805_BALUN]  110.67,17.2 270 top
U$138  MPU-9250  [QFN_3X3MM]  119.11,15.98 0 bottom
U$139  1X1_ROUND  [1X1_ROUND]  133.5,9.05 0 top
U$140  1X1_ROUND  [1X1_ROUND]  135.6,8.49 0 top
U$141  1X1_ROUND  [1X1_ROUND]  134.54,8.69 0 top
U$142  1X1_ROUND  [1X1_ROUND]  132.53,9.52 0 top
U$143  1X1_ROUND  [1X1_ROUND]  131.62,10.12 0 top
U$144  1X1_ROUND  [1X1_ROUND]  130.81,10.83 0 top
U$145  1X1_ROUND  [1X1_ROUND]  130.1,11.67 0 top
U$146  1X1_ROUND  [1X1_ROUND]  129.49,12.58 0 top
U$147  1X1_ROUND  [1X1_ROUND]  132.5,23.68 0 top
U$148  1X1_ROUND  [1X1_ROUND]  133.46,24.18 0 top
U$149  1X1_ROUND  [1X1_ROUND]  134.49,24.53 0 top
U$150  1X1_ROUND  [1X1_ROUND]  138.86,24.5 0 top
U$151  1X1_ROUND  [1X1_ROUND]  137.74,24.72 0 top
U$152  1X1_ROUND  [1X1_ROUND]  136.62,24.82 0 top
U$153  1X1_ROUND  [1X1_ROUND]  138.91,8.77 0 top
U$154  1X1_ROUND  [1X1_ROUND]  139.95,9.14 0 top
U$155  1X1_ROUND  [1X1_ROUND]  135.56,24.75 0 top
U$156  1X1_ROUND  [1X1_ROUND]  136.7,8.43 0 top
U$157  1X1_ROUND  [1X1_ROUND]  137.81,8.51 0 top
U$158  MS5611-01BA03  [MS5611-01BA03]  143.41,16.63 0 bottom
U$159  ATSAMR21E18A-MUT  [QFN32]  135.43,17.54 270 top
U$160  JOHANSON_2450BM15A0015E  [0805_BALUN]  130.67,17.2 270 top
U$161  MPU-9250  [QFN_3X3MM]  139.11,15.98 0 bottom
U$162  1X1_ROUND  [1X1_ROUND]  153.5,9.05 0 top
U$163  1X1_ROUND  [1X1_ROUND]  155.6,8.49 0 top
U$164  1X1_ROUND  [1X1_ROUND]  154.54,8.69 0 top
U$165  1X1_ROUND  [1X1_ROUND]  152.53,9.52 0 top
U$166  1X1_ROUND  [1X1_ROUND]  151.62,10.12 0 top
U$167  1X1_ROUND  [1X1_ROUND]  150.81,10.83 0 top
U$168  1X1_ROUND  [1X1_ROUND]  150.1,11.67 0 top
U$169  1X1_ROUND  [1X1_ROUND]  149.49,12.58 0 top
U$170  1X1_ROUND  [1X1_ROUND]  152.5,23.68 0 top
U$171  1X1_ROUND  [1X1_ROUND]  153.46,24.18 0 top
U$172  1X1_ROUND  [1X1_ROUND]  154.49,24.53 0 top
U$173  1X1_ROUND  [1X1_ROUND]  158.86,24.5 0 top
U$174  1X1_ROUND  [1X1_ROUND]  157.74,24.72 0 top
U$175  1X1_ROUND  [1X1_ROUND]  156.62,24.82 0 top
U$176  1X1_ROUND  [1X1_ROUND]  158.91,8.77 0 top
U$177  1X1_ROUND  [1X1_ROUND]  159.95,9.14 0 top
U$178  1X1_ROUND  [1X1_ROUND]  155.56,24.75 0 top
U$179  1X1_ROUND  [1X1_ROUND]  156.7,8.43 0 top
U$180  1X1_ROUND  [1X1_ROUND]  157.81,8.51 0 top
U$181  MS5611-01BA03  [MS5611-01BA03]  163.41,16.63 0 bottom
U$182  ATSAMR21E18A-MUT  [QFN32]  155.43,17.54 270 top
U$183  JOHANSON_2450BM15A0015E  [0805_BALUN]  150.67,17.2 270 top
U$184  MPU-9250  [QFN_3X3MM]  159.11,15.98 0 bottom
USB  USB_MICROB  [USB_MICROB_PACKAGE]  22.8,16.64 90 top
USB1  USB_MICROB  [USB_MICROB_PACKAGE]  42.8,16.64 90 top
USB2  USB_MICROB  [USB_MICROB_PACKAGE]  62.8,16.64 90 top
USB3  USB_MICROB  [USB_MICROB_PACKAGE]  82.8,16.64 90 top
USB4  USB_MICROB  [USB_MICROB_PACKAGE]  102.8,16.64 90 top
USB5  USB_MICROB  [USB_MICROB_PACKAGE]  122.8,16.64 90 top
USB6  USB_MICROB  [USB_MICROB_PACKAGE]  142.8,16.64 90 top
USB7  USB_MICROB  [USB_MICROB_PACKAGE]  162.8,16.64 90 top

## Library data of the parts
ANT1-ANT8 = bar_antenna
BTN BTN1-BTN7 USB USB1-USB7 = femtoduino
C1-C4 C8-C19 C25-C33 C36-C48 C52-C56 C59-C71 C75-C79 C82-C94 C98-C102 C105-C117 C121-C125 C128-C140 C144-C148 C151-C163 C167-C171 C174-C184 = parts_0201; DIGIKEY_PART: 490-3194-1-ND
C5-C7 C20 C23 C24 C49-C51 C72-C74 C95-C97 C118-C120 C141-C143 C164-C166 R1-R40 = parts_0201
C21 C22 C34 C35 C57 C58 C80 C81 C103 C104 C126 C127 C149 C150 C172 C173 FB1-FB8 L1-L8 LED1-LED8 = microbuilder
LDO_VREG LDO_VREG1-LDO_VREG7 = MCP1700T-3302E_TT
SER3628CT-ND SER3628CT-ND1-SER3628CT-ND7 TSX-3225_CRYSTAL TSX-3225_CRYSTAL1-TSX-3225_CRYSTAL7 = crystals
U$1-U$5 U$7-U$11 U$13-U$27 U$32-U$43 U$45-U$64 U$69-U$75 U$77-U$88 U$93-U$111 U$116-U$134 U$139-U$157 U$162-U$180 = pins_1.27mm_pitch
U$6 U$31 U$68 U$92 U$115 U$138 U$161 U$184 = mpu9250
U$12 U$30 U$67 U$91 U$114 U$137 U$160 U$183 = balun
U$28 U$44 U$65 U$89 U$112 U$135 U$158 U$181 = freeimu
U$29 U$66 U$76 U$90 U$113 U$136 U$159 U$182 = atmel-samr21

## Nets
3.3V: C5.1 C10.1 C16.1 C21.2 C29.1 C30.2 C31.2 L6.1 LDO_VREG.VOUT R2.2 R8.2 R9.2 U$5.P$1 U$6.P$1 U$6.P$8 U$6.P$13 U$6.P$22 U$44.1 U$44.2 U$76.24 U$76.30
3.3V1: C20.1 C25.1 C28.1 C34.2 C36.1 C44.2 C45.2 L1.1 LDO_VREG1.VOUT R5.2 R7.2 R10.2 U$8.P$1 U$28.1 U$28.2 U$29.24 U$29.30 U$31.P$1 U$31.P$8 U$31.P$13 U$31.P$22
3.3V2: C49.1 C52.1 C55.1 C57.2 C59.1 C67.2 C68.2 L2.1 LDO_VREG2.VOUT R12.2 R14.2 R15.2 U$34.P$1 U$65.1 U$65.2 U$66.24 U$66.30 U$68.P$1 U$68.P$8 U$68.P$13 U$68.P$22
3.3V3: C72.1 C75.1 C78.1 C80.2 C82.1 C90.2 C91.2 L3.1 LDO_VREG3.VOUT R17.2 R19.2 R20.2 U$71.P$1 U$89.1 U$89.2 U$90.24 U$90.30 U$92.P$1 U$92.P$8 U$92.P$13 U$92.P$22
3.3V4: C95.1 C98.1 C101.1 C103.2 C105.1 C113.2 C114.2 L4.1 LDO_VREG4.VOUT R22.2 R24.2 R25.2 U$95.P$1 U$112.1 U$112.2 U$113.24 U$113.30 U$115.P$1 U$115.P$8 U$115.P$13 U$115.P$22
3.3V5: C118.1 C121.1 C124.1 C126.2 C128.1 C136.2 C137.2 L5.1 LDO_VREG5.VOUT R27.2 R29.2 R30.2 U$118.P$1 U$135.1 U$135.2 U$136.24 U$136.30 U$138.P$1 U$138.P$8 U$138.P$13 U$138.P$22
3.3V6: C141.1 C144.1 C147.1 C149.2 C151.1 C159.2 C160.2 L7.1 LDO_VREG6.VOUT R32.2 R34.2 R35.2 U$141.P$1 U$158.1 U$158.2 U$159.24 U$159.30 U$161.P$1 U$161.P$8 U$161.P$13 U$161.P$22
3.3V7: C164.1 C167.1 C170.1 C172.2 C174.1 C182.2 C183.2 L8.1 LDO_VREG7.VOUT R37.2 R39.2 R40.2 U$164.P$1 U$181.1 U$181.2 U$182.24 U$182.30 U$184.P$1 U$184.P$8 U$184.P$13 U$184.P$22
ANT_OUT: ANT1.1 U$12.1
ANT_OUT1: ANT2.1 U$30.1
ANT_OUT2: ANT3.1 U$67.1
ANT_OUT3: ANT4.1 U$91.1
ANT_OUT4: ANT5.1 U$114.1
ANT_OUT5: ANT6.1 U$137.1
ANT_OUT6: ANT7.1 U$160.1
ANT_OUT7: ANT8.1 U$183.1
AVDD: C17.1 U$76.5
AVDD1: C33.1 U$29.5
AVDD2: C56.1 U$66.5
AVDD3: C79.1 U$90.5
AVDD4: C102.1 U$113.5
AVDD5: C125.1 U$136.5
AVDD6: C148.1 U$159.5
AVDD7: C171.1 U$182.5
DVDD: C2.1 U$76.21
DVDD1: C19.1 U$29.21
DVDD2: C48.1 U$66.21
DVDD3: C71.1 U$90.21
DVDD4: C94.1 U$113.21
DVDD5: C117.1 U$136.21
DVDD6: C140.1 U$159.21
DVDD7: C163.1 U$182.21
GND: ANT1.3 BTN.2 C1.2 C2.2 C3.1 C4.2 C5.2 C6.2 C7.2 C8.2 C9.2 C10.2 C13.2 C14.1 C15.2 C16.2 C17.2 C21.1 C22.1 C29.2 C30.1 C31.1 C32.2 FB1.2 LDO_VREG.GND LED2.C SER3628CT-ND.2 SER3628CT-ND.4 TSX-3225_CRYSTAL.2 TSX-3225_CRYSTAL.4 U$2.P$1 U$6.P$20 U$12.2 U$12.5 U$12.6 U$44.3 U$44.4 U$44.5 U$76.3 U$76.6 U$76.11 U$76.14 U$76.28 U$76.33
GND1: ANT2.3 BTN1.2 C18.2 C19.2 C20.2 C23.2 C24.2 C25.2 C26.2 C27.2 C28.2 C33.2 C34.1 C35.1 C36.2 C37.1 C38.2 C41.2 C42.1 C43.2 C44.1 C45.1 C46.2 FB2.2 LDO_VREG1.GND LED1.C SER3628CT-ND1.2 SER3628CT-ND1.4 TSX-3225_CRYSTAL1.2 TSX-3225_CRYSTAL1.4 U$4.P$1 U$28.3 U$28.4 U$28.5 U$29.3 U$29.6 U$29.11 U$29.14 U$29.28 U$29.33 U$30.2 U$30.5 U$30.6 U$31.P$20
GND2: ANT3.3 BTN2.2 C47.2 C48.2 C49.2 C50.2 C51.2 C52.2 C53.2 C54.2 C55.2 C56.2 C57.1 C58.1 C59.2 C60.1 C61.2 C64.2 C65.1 C66.2 C67.1 C68.1 C69.2 FB3.2 LDO_VREG2.GND LED3.C SER3628CT-ND2.2 SER3628CT-ND2.4 TSX-3225_CRYSTAL2.2 TSX-3225_CRYSTAL2.4 U$33.P$1 U$65.3 U$65.4 U$65.5 U$66.3 U$66.6 U$66.11 U$66.14 U$66.28 U$66.33 U$67.2 U$67.5 U$67.6 U$68.P$20
GND3: ANT4.3 BTN3.2 C70.2 C71.2 C72.2 C73.2 C74.2 C75.2 C76.2 C77.2 C78.2 C79.2 C80.1 C81.1 C82.2 C83.1 C84.2 C87.2 C88.1 C89.2 C90.1 C91.1 C92.2 FB4.2 LDO_VREG3.GND LED4.C SER3628CT-ND3.2 SER3628CT-ND3.4 TSX-3225_CRYSTAL3.2 TSX-3225_CRYSTAL3.4 U$70.P$1 U$89.3 U$89.4 U$89.5 U$90.3 U$90.6 U$90.11 U$90.14 U$90.28 U$90.33 U$91.2 U$91.5 U$91.6 U$92.P$20
GND4: ANT5.3 BTN4.2 C93.2 C94.2 C95.2 C96.2 C97.2 C98.2 C99.2 C100.2 C101.2 C102.2 C103.1 C104.1 C105.2 C106.1 C107.2 C110.2 C111.1 C112.2 C113.1 C114.1 C115.2 FB5.2 LDO_VREG4.GND LED5.C SER3628CT-ND4.2 SER3628CT-ND4.4 TSX-3225_CRYSTAL4.2 TSX-3225_CRYSTAL4.4 U$94.P$1 U$112.3 U$112.4 U$112.5 U$113.3 U$113.6 U$113.11 U$113.14 U$113.28 U$113.33 U$114.2 U$114.5 U$114.6 U$115.P$20
GND5: ANT6.3 BTN5.2 C116.2 C117.2 C118.2 C119.2 C120.2 C121.2 C122.2 C123.2 C124.2 C125.2 C126.1 C127.1 C128.2 C129.1 C130.2 C133.2 C134.1 C135.2 C136.1 C137.1 C138.2 FB6.2 LDO_VREG5.GND LED6.C SER3628CT-ND5.2 SER3628CT-ND5.4 TSX-3225_CRYSTAL5.2 TSX-3225_CRYSTAL5.4 U$117.P$1 U$135.3 U$135.4 U$135.5 U$136.3 U$136.6 U$136.11 U$136.14 U$136.28 U$136.33 U$137.2 U$137.5 U$137.6 U$138.P$20
GND6: ANT7.3 BTN6.2 C139.2 C140.2 C141.2 C142.2 C143.2 C144.2 C145.2 C146.2 C147.2 C148.2 C149.1 C150.1 C151.2 C152.1 C153.2 C156.2 C157.1 C158.2 C159.1 C160.1 C161.2 FB7.2 LDO_VREG6.GND LED7.C SER3628CT-ND6.2 SER3628CT-ND6.4 TSX-3225_CRYSTAL6.2 TSX-3225_CRYSTAL6.4 U$140.P$1 U$158.3 U$158.4 U$158.5 U$159.3 U$159.6 U$159.11 U$159.14 U$159.28 U$159.33 U$160.2 U$160.5 U$160.6 U$161.P$20
GND7: ANT8.3 BTN7.2 C162.2 C163.2 C164.2 C165.2 C166.2 C167.2 C168.2 C169.2 C170.2 C171.2 C172.1 C173.1 C174.2 C175.1 C176.2 C179.2 C180.1 C181.2 C182.1 C183.1 C184.2 FB8.2 LDO_VREG7.GND LED8.C SER3628CT-ND7.2 SER3628CT-ND7.4 TSX-3225_CRYSTAL7.2 TSX-3225_CRYSTAL7.4 U$163.P$1 U$181.3 U$181.4 U$181.5 U$182.3 U$182.6 U$182.11 U$182.14 U$182.28 U$182.33 U$183.2 U$183.5 U$183.6 U$184.P$20
N$1: C11.2 U$12.3
N$2: ANT1.2 C13.1
N$3: C12.2 U$12.4
N$4: C32.1 U$6.P$10
N$5: FB1.1 USB.5 USB.6 USB.7 USB.8 USB.9 USB.10 USB.11
N$7: BTN1.1 R3.1
N$8: LED1.A R6.2
N$9: C39.2 U$30.3
N$10: C40.2 U$30.4
N$11: ANT2.2 C41.1
N$12: C46.1 U$31.P$10
N$13: LED2.A R4.2
N$14: FB2.1 USB1.5 USB1.6 USB1.7 USB1.8 USB1.9 USB1.10 USB1.11
N$16: BTN2.1 R11.1
N$17: LED3.A R13.2
N$18: C62.2 U$67.3
N$19: C63.2 U$67.4
N$20: ANT3.2 C64.1
N$21: C69.1 U$68.P$10
N$22: FB3.1 USB2.5 USB2.6 USB2.7 USB2.8 USB2.9 USB2.10 USB2.11
N$24: BTN3.1 R16.1
N$25: LED4.A R18.2
N$26: BTN.1 R1.1
N$27: C85.2 U$91.3
N$28: C86.2 U$91.4
N$29: ANT4.2 C87.1
N$30: C92.1 U$92.P$10
N$31: FB4.1 USB3.5 USB3.6 USB3.7 USB3.8 USB3.9 USB3.10 USB3.11
N$33: BTN4.1 R21.1
N$34: LED5.A R23.2
N$35: C108.2 U$114.3
N$36: C109.2 U$114.4
N$37: ANT5.2 C110.1
N$38: C115.1 U$115.P$10
N$39: FB5.1 USB4.5 USB4.6 USB4.7 USB4.8 USB4.9 USB4.10 USB4.11
N$41: BTN5.1 R26.1
N$42: LED6.A R28.2
N$43: C131.2 U$137.3
N$44: C132.2 U$137.4
N$45: ANT6.2 C133.1
N$46: C138.1 U$138.P$10
N$47: FB6.1 USB5.5 USB5.6 USB5.7 USB5.8 USB5.9 USB5.10 USB5.11
N$49: BTN6.1 R31.1
N$50: LED7.A R33.2
N$51: C154.2 U$160.3
N$52: C155.2 U$160.4
N$53: ANT7.2 C156.1
N$54: C161.1 U$161.P$10
N$55: FB7.1 USB6.5 USB6.6 USB6.7 USB6.8 USB6.9 USB6.10 USB6.11
N$57: BTN7.1 R36.1
N$58: LED8.A R38.2
N$59: C177.2 U$183.3
N$60: C178.2 U$183.4
N$61: ANT8.2 C179.1
N$62: C184.1 U$184.P$10
N$63: FB8.1 USB7.5 USB7.6 USB7.7 USB7.8 USB7.9 USB7.10 USB7.11
PA01: U$25.P$1 U$29.7
PA02: U$19.P$1 U$29.8
PA03: U$23.P$1 U$29.25
PA04: U$24.P$1 U$29.27
PA05: U$62.P$1 U$66.7
PA06: U$54.P$1 U$76.7
PA07: U$43.P$1 U$76.8
PA08: U$56.P$1 U$66.8
PA08/I2C: R8.1 U$6.P$24 U$42.P$1 U$44.7 U$76.9
PA08/I2C1: R7.1 U$18.P$1 U$28.7 U$29.9 U$31.P$24
PA08/I2C2: R14.1 U$55.P$1 U$65.7 U$66.9 U$68.P$24
PA08/I2C3: R19.1 U$79.P$1 U$89.7 U$90.9 U$92.P$24
PA08/I2C4: R24.1 U$102.P$1 U$112.7 U$113.9 U$115.P$24
PA08/I2C5: R29.1 U$125.P$1 U$135.7 U$136.9 U$138.P$24
PA08/I2C6: R34.1 U$148.P$1 U$158.7 U$159.9 U$161.P$24
PA08/I2C7: R39.1 U$171.P$1 U$181.7 U$182.9 U$184.P$24
PA09: U$60.P$1 U$66.25
PA09/I2C: R9.1 U$6.P$23 U$41.P$1 U$44.8 U$76.10
PA09/I2C1: R10.1 U$17.P$1 U$28.8 U$29.10 U$31.P$23
PA09/I2C2: R15.1 U$53.P$1 U$65.8 U$66.10 U$68.P$23
PA09/I2C3: R20.1 U$78.P$1 U$89.8 U$90.10 U$92.P$23
PA09/I2C4: R25.1 U$101.P$1 U$112.8 U$113.10 U$115.P$23
PA09/I2C5: R30.1 U$124.P$1 U$135.8 U$136.10 U$138.P$23
PA09/I2C6: R35.1 U$147.P$1 U$158.8 U$159.10 U$161.P$23
PA09/I2C7: R40.1 U$170.P$1 U$181.8 U$182.10 U$184.P$23
PA10: U$61.P$1 U$66.27
PA11: U$86.P$1 U$90.7
PA12: U$80.P$1 U$90.8
PA13: U$84.P$1 U$90.25
PA14: U$85.P$1 U$90.27
PA14/XIN_MC: C3.2 TSX-3225_CRYSTAL.1 U$76.15
PA14/XIN_MC1: C37.2 TSX-3225_CRYSTAL1.1 U$29.15
PA14/XIN_MC2: C60.2 TSX-3225_CRYSTAL2.1 U$66.15
PA14/XIN_MC3: C83.2 TSX-3225_CRYSTAL3.1 U$90.15
PA14/XIN_MC4: C106.2 TSX-3225_CRYSTAL4.1 U$113.15
PA14/XIN_MC5: C129.2 TSX-3225_CRYSTAL5.1 U$136.15
PA14/XIN_MC6: C152.2 TSX-3225_CRYSTAL6.1 U$159.15
PA14/XIN_MC7: C175.2 TSX-3225_CRYSTAL7.1 U$182.15
PA15: U$109.P$1 U$113.7
PA15/XOUT_MC: C4.1 TSX-3225_CRYSTAL.3 U$39.P$1 U$76.16
PA15/XOUT_MC1: C38.1 TSX-3225_CRYSTAL1.3 U$16.P$1 U$29.16
PA15/XOUT_MC2: C61.1 TSX-3225_CRYSTAL2.3 U$52.P$1 U$66.16
PA15/XOUT_MC3: C84.1 TSX-3225_CRYSTAL3.3 U$77.P$1 U$90.16
PA15/XOUT_MC4: C107.1 TSX-3225_CRYSTAL4.3 U$100.P$1 U$113.16
PA15/XOUT_MC5: C130.1 TSX-3225_CRYSTAL5.3 U$123.P$1 U$136.16
PA15/XOUT_MC6: C153.1 TSX-3225_CRYSTAL6.3 U$146.P$1 U$159.16
PA15/XOUT_MC7: C176.1 TSX-3225_CRYSTAL7.3 U$169.P$1 U$182.16
PA16: U$103.P$1 U$113.8
PA16/I2C: U$38.P$1 U$76.17
PA16/I2C1: U$15.P$1 U$29.17
PA16/I2C2: U$51.P$1 U$66.17
PA16/I2C3: U$75.P$1 U$90.17
PA16/I2C4: U$99.P$1 U$113.17
PA16/I2C5: U$122.P$1 U$136.17
PA16/I2C6: U$145.P$1 U$159.17
PA16/I2C7: U$168.P$1 U$182.17
PA17: U$107.P$1 U$113.25
PA17/I2C: U$37.P$1 U$76.18
PA17/I2C1: U$14.P$1 U$29.18
PA17/I2C2: U$50.P$1 U$66.18
PA17/I2C3: U$74.P$1 U$90.18
PA17/I2C4: U$98.P$1 U$113.18
PA17/I2C5: U$121.P$1 U$136.18
PA17/I2C6: U$144.P$1 U$159.18
PA17/I2C7: U$167.P$1 U$182.18
PA18: U$108.P$1 U$113.27
PA18/INTA: U$6.P$11 U$36.P$1 U$76.19
PA18/INTA1: U$13.P$1 U$29.19 U$31.P$11
PA18/INTA2: U$49.P$1 U$66.19 U$68.P$11
PA18/INTA3: U$73.P$1 U$90.19 U$92.P$11
PA18/INTA4: U$97.P$1 U$113.19 U$115.P$11
PA18/INTA5: U$120.P$1 U$136.19 U$138.P$11
PA18/INTA6: U$143.P$1 U$159.19 U$161.P$11
PA18/INTA7: U$166.P$1 U$182.19 U$184.P$11
PA19: U$132.P$1 U$136.7
PA19/FSYNC: U$6.P$12 U$35.P$1 U$76.20
PA19/FSYNC1: U$11.P$1 U$29.20 U$31.P$12
PA19/FSYNC2: U$40.P$1 U$66.20 U$68.P$12
PA19/FSYNC3: U$72.P$1 U$90.20 U$92.P$12
PA19/FSYNC4: U$96.P$1 U$113.20 U$115.P$12
PA19/FSYNC5: U$119.P$1 U$136.20 U$138.P$12
PA19/FSYNC6: U$142.P$1 U$159.20 U$161.P$12
PA19/FSYNC7: U$165.P$1 U$182.20 U$184.P$12
PA20: U$126.P$1 U$136.8
PA21: U$130.P$1 U$136.25
PA22: U$131.P$1 U$136.27
PA23: U$155.P$1 U$159.7
PA24: U$149.P$1 U$159.8
PA24/USBDM: U$9.P$1 U$76.22 USB.2
PA24/USBDM1: U$26.P$1 U$29.22 USB1.2
PA24/USBDM2: U$63.P$1 U$66.22 USB2.2
PA24/USBDM3: U$87.P$1 U$90.22 USB3.2
PA24/USBDM4: U$110.P$1 U$113.22 USB4.2
PA24/USBDM5: U$133.P$1 U$136.22 USB5.2
PA24/USBDM6: U$156.P$1 U$159.22 USB6.2
PA24/USBDM7: U$179.P$1 U$182.22 USB7.2
PA25: U$153.P$1 U$159.25
PA25/USBDP: U$10.P$1 U$76.23 USB.3
PA25/USBDP1: U$27.P$1 U$29.23 USB1.3
PA25/USBDP2: U$64.P$1 U$66.23 USB2.3
PA25/USBDP3: U$88.P$1 U$90.23 USB3.3
PA25/USBDP4: U$111.P$1 U$113.23 USB4.3
PA25/USBDP5: U$134.P$1 U$136.23 USB5.3
PA25/USBDP6: U$157.P$1 U$159.23 USB6.3
PA25/USBDP7: U$180.P$1 U$182.23 USB7.3
PA26: U$154.P$1 U$159.27
PA27: U$7.P$1 U$76.25
PA28: U$48.P$1 U$76.27
PA29: U$178.P$1 U$182.7
PA30: U$172.P$1 U$182.8
PA30/SWCLK: R4.1 U$46.P$1 U$76.31
PA30/SWCLK1: R6.1 U$21.P$1 U$29.31
PA30/SWCLK2: R13.1 U$58.P$1 U$66.31
PA30/SWCLK3: R18.1 U$82.P$1 U$90.31
PA30/SWCLK4: R23.1 U$105.P$1 U$113.31
PA30/SWCLK5: R28.1 U$128.P$1 U$136.31
PA30/SWCLK6: R33.1 U$151.P$1 U$159.31
PA30/SWCLK7: R38.1 U$174.P$1 U$182.31
PA31: U$176.P$1 U$182.25
PA31/SWDIO: U$47.P$1 U$76.32
PA31/SWDIO1: U$22.P$1 U$29.32
PA31/SWDIO2: U$59.P$1 U$66.32
PA31/SWDIO3: U$83.P$1 U$90.32
PA31/SWDIO4: U$106.P$1 U$113.32
PA31/SWDIO5: U$129.P$1 U$136.32
PA31/SWDIO6: U$152.P$1 U$159.32
PA31/SWDIO7: U$175.P$1 U$182.32
PA32: U$177.P$1 U$182.27
RESET: C1.1 R1.2 R2.1 U$45.P$1 U$76.26
RESET1: C18.1 R3.2 R5.1 U$20.P$1 U$29.26
RESET2: C47.1 R11.2 R12.1 U$57.P$1 U$66.26
RESET3: C70.1 R16.2 R17.1 U$81.P$1 U$90.26
RESET4: C93.1 R21.2 R22.1 U$104.P$1 U$113.26
RESET5: C116.1 R26.2 R27.1 U$127.P$1 U$136.26
RESET6: C139.1 R31.2 R32.1 U$150.P$1 U$159.26
RESET7: C162.1 R36.2 R37.1 U$173.P$1 U$182.26
RFN: C11.1 U$76.13
RFN1: C39.1 U$29.13
RFN2: C62.1 U$66.13
RFN3: C85.1 U$90.13
RFN4: C108.1 U$113.13
RFN5: C131.1 U$136.13
RFN6: C154.1 U$159.13
RFN7: C177.1 U$182.13
RFP: C12.1 U$76.12
RFP1: C40.1 U$29.12
RFP2: C63.1 U$66.12
RFP3: C86.1 U$90.12
RFP4: C109.1 U$113.12
RFP5: C132.1 U$136.12
RFP6: C155.1 U$159.12
RFP7: C178.1 U$182.12
VDDANA: C8.1 C22.2 L6.2 U$76.4
VDDANA1: C26.1 C35.2 L1.2 U$29.4
VDDANA2: C53.1 C58.2 L2.2 U$66.4
VDDANA3: C76.1 C81.2 L3.2 U$90.4
VDDANA4: C99.1 C104.2 L4.2 U$113.4
VDDANA5: C122.1 C127.2 L5.2 U$136.4
VDDANA6: C145.1 C150.2 L7.2 U$159.4
VDDANA7: C168.1 C173.2 L8.2 U$182.4
VDDCORE: C9.1 U$76.29
VDDCORE1: C27.1 U$29.29
VDDCORE2: C54.1 U$66.29
VDDCORE3: C77.1 U$90.29
VDDCORE4: C100.1 U$113.29
VDDCORE5: C123.1 U$136.29
VDDCORE6: C146.1 U$159.29
VDDCORE7: C169.1 U$182.29
VIN: C6.1 C7.1 LDO_VREG.VIN U$1.P$1 USB.1
VIN1: C23.1 C24.1 LDO_VREG1.VIN U$3.P$1 USB1.1
VIN2: C50.1 C51.1 LDO_VREG2.VIN U$32.P$1 USB2.1
VIN3: C73.1 C74.1 LDO_VREG3.VIN U$69.P$1 USB3.1
VIN4: C96.1 C97.1 LDO_VREG4.VIN U$93.P$1 USB4.1
VIN5: C119.1 C120.1 LDO_VREG5.VIN U$116.P$1 USB5.1
VIN6: C142.1 C143.1 LDO_VREG6.VIN U$139.P$1 USB6.1
VIN7: C165.1 C166.1 LDO_VREG7.VIN U$162.P$1 USB7.1
XTALIN: C14.2 SER3628CT-ND.1 U$76.2
XTALIN1: C42.2 SER3628CT-ND1.1 U$29.2
XTALIN2: C65.2 SER3628CT-ND2.1 U$66.2
XTALIN3: C88.2 SER3628CT-ND3.1 U$90.2
XTALIN4: C111.2 SER3628CT-ND4.1 U$113.2
XTALIN5: C134.2 SER3628CT-ND5.1 U$136.2
XTALIN6: C157.2 SER3628CT-ND6.1 U$159.2
XTALIN7: C180.2 SER3628CT-ND7.1 U$182.2
XTALOUT: C15.1 SER3628CT-ND.3 U$76.1
XTALOUT1: C43.1 SER3628CT-ND1.3 U$29.1
XTALOUT2: C66.1 SER3628CT-ND2.3 U$66.1
XTALOUT3: C89.1 SER3628CT-ND3.3 U$90.1
XTALOUT4: C112.1 SER3628CT-ND4.3 U$113.1
XTALOUT5: C135.1 SER3628CT-ND5.3 U$136.1
XTALOUT6: C158.1 SER3628CT-ND6.3 U$159.1
XTALOUT7: C181.1 SER3628CT-ND7.3 U$182.1

## Tracks (layer width: path | path; a pad name or v marks a point on that pad's centre or on a via)
3.3V  (via drill 0.2 pad 0.51)
  Top 0.14: C31.2 14.5,9.94 v14.53,9.96
  Top 0.152: C30.2 15.55,12.74 v15.55,12.64 | U$76.24 17.18,13.81 v16.97,13.61 | C31.2 14.5,10.38 14.63,10.52 14.63,10.93 C10.1 | LDO_VREG.VOUT 18.68,11.64 v18.69,11.63 | U$76.30 18.75,18.29 v19,18.54
  Top 0.203: C21.2 10.87,20.93
  Top 0.254: 10.87,20.93 L6.1 10.13,20.8 v9.91,20.52 | R2.2 19.47,10.29 C5.1 19.09,11.23 v18.69,11.63
  Route2 0.254: v9.91,20.52 10.57,20.52 12.09,22.05 15.19,22.05 16.2,23.06 20.47,23.06 v21.74,21.79 | v17.68,10.46 17.68,11.33 17.93,11.58 18.64,11.58 v18.69,11.63
  Route15 0.203: v16.97,13.61 16.07,13.61 15.6,13.14 15.6,12.69 v15.55,12.64
  Route15 0.254: v21.74,21.79 21.74,21.74 22.1,21.39 22.1,19.46 21.13,18.49 19.05,18.49 v19,18.54
  Bottom 0.14: v14.53,9.96 U$5.P$1 | v15.55,12.64 C30.2
  Bottom 0.152: 15.14,9.96 16.41,9.96 16.87,10.41 17.63,10.41 v17.68,10.46 17.27,10.82 C29.1 | 15.14,9.96 v14.53,9.96 | 15.14,9.96 15.55,10.37 v15.55,12.64 14.82,13.36 14.22,13.36 13.77,13.82 13.77,14.17 13,14.94 13,16 13.72,16.71 15.49,16.71 15.9,16.31 15.9,15.39 16.31,14.98 U$6.P$13 | U$6.P$8 19.71,14.02 19.46,13.77 19.46,12.24 | 19.46,12.24 19.46,11.94 19.15,11.63 v18.69,11.63 | U$6.P$22 19.31,18.23 v19,18.54 | 19.46,12.24 19.91,12.7 20.62,12.7 21.34,13.41 21.34,16.93 21.28,16.98
  Bottom 0.203: U$44.1 U$44.2 24.26,17.25 23.62,16.61 21.79,16.61 21.42,16.98 21.28,16.98 U$6.P$1
  Bottom 0.254: U$44.1 24.22,18.5 23.32,19.41 23.32,20.93 22.45,21.79 v21.74,21.79 21.54,21.79 20.68,22.66 18.24,22.66 R8.2 R9.2
3.3V1  (via drill 0.2 pad 0.51)
  Top 0.14: C44.2 34.5,9.94 v34.53,9.96
  Top 0.152: C45.2 35.55,12.74 v35.55,12.64 | U$29.24 37.18,13.81 v36.97,13.61 | C44.2 34.5,10.38 34.63,10.52 34.63,10.93 C36.1 | LDO_VREG1.VOUT 38.68,11.64 v38.69,11.63 | U$29.30 38.75,18.29 v39,18.54
  Top 0.203: C34.2 30.87,20.93
  Top 0.254: 30.87,20.93 L1.1 30.13,20.8 v29.91,20.52 | R5.2 39.47,10.29 C20.1 39.09,11.23 v38.69,11.63
  Route2 0.254: v29.91,20.52 30.57,20.52 32.09,22.05 35.19,22.05 36.2,23.06 40.47,23.06 v41.74,21.79 | v37.68,10.46 37.68,11.33 37.93,11.58 38.64,11.58 v38.69,11.63
  Route15 0.203: v36.97,13.61 36.07,13.61 35.6,13.14 35.6,12.69 v35.55,12.64
  Route15 0.254: v41.74,21.79 41.74,21.74 42.1,21.39 42.1,19.46 41.13,18.49 39.05,18.49 v39,18.54
  Bottom 0.14: v34.53,9.96 U$8.P$1 | v35.55,12.64 C45.2
  Bottom 0.152: 35.14,9.96 36.41,9.96 36.87,10.41 37.63,10.41 v37.68,10.46 37.27,10.82 C25.1 | 35.14,9.96 v34.53,9.96 | 35.14,9.96 35.55,10.37 v35.55,12.64 34.83,13.36 34.22,13.36 33.77,13.82 33.77,14.17 33.01,14.94 33.01,16 33.72,16.71 35.49,16.71 35.9,16.31 35.9,15.39 36.31,14.98 U$31.P$13 | U$31.P$8 39.71,14.02 39.46,13.77 39.46,12.24 | 39.46,12.24 39.46,11.94 39.15,11.63 v38.69,11.63 | U$31.P$22 39.31,18.23 v39,18.54 | 39.46,12.24 39.91,12.7 40.62,12.7 41.34,13.41 41.34,16.93 41.28,16.98
  Bottom 0.203: U$28.1 U$28.2 44.26,17.25 43.62,16.61 41.79,16.61 41.42,16.98 41.28,16.98 U$31.P$1
  Bottom 0.254: U$28.1 44.22,18.5 43.32,19.41 43.32,20.93 42.45,21.79 v41.74,21.79 41.54,21.79 40.68,22.66 38.24,22.66 R7.2 R10.2
3.3V2  (via drill 0.2 pad 0.51)
  Top 0.14: C67.2 54.5,9.94 v54.53,9.96
  Top 0.152: C68.2 55.55,12.74 v55.55,12.64 | U$66.24 57.18,13.81 v56.97,13.61 | C67.2 54.5,10.38 54.63,10.52 54.63,10.93 C59.1 | LDO_VREG2.VOUT 58.68,11.64 v58.69,11.63 | U$66.30 58.75,18.29 v59,18.54
  Top 0.203: C57.2 50.87,20.93
  Top 0.254: 50.87,20.93 L2.1 50.13,20.8 v49.91,20.52 | R12.2 59.47,10.29 C49.1 59.09,11.23 v58.69,11.63
  Route2 0.254: v49.91,20.52 50.57,20.52 52.09,22.05 55.19,22.05 56.2,23.06 60.47,23.06 v61.74,21.79 | v57.68,10.46 57.68,11.33 57.93,11.58 58.64,11.58 v58.69,11.63
  Route15 0.203: v56.97,13.61 56.07,13.61 55.6,13.14 55.6,12.69 v55.55,12.64
  Route15 0.254: v61.74,21.79 61.74,21.74 62.1,21.39 62.1,19.46 61.13,18.49 59.05,18.49 v59,18.54
  Bottom 0.14: v54.53,9.96 54.53,8.7 U$34.P$1 | v55.55,12.64 C68.2
  Bottom 0.152: 55.14,9.96 56.41,9.96 56.86,10.41 57.63,10.41 v57.68,10.46 57.27,10.82 C52.1 | 55.14,9.96 v54.53,9.96 | 55.14,9.96 55.55,10.37 v55.55,12.64 54.82,13.36 54.22,13.36 53.77,13.82 53.77,14.17 53,14.94 53,16 53.72,16.71 55.49,16.71 55.9,16.31 55.9,15.39 56.31,14.98 U$68.P$13 | U$68.P$8 59.71,14.02 59.46,13.77 59.46,12.24 | 59.46,12.24 59.46,11.94 59.15,11.63 v58.69,11.63 | U$68.P$22 59.31,18.23 v59,18.54 | 59.46,12.24 59.91,12.7 60.62,12.7 61.34,13.41 61.34,16.93 61.28,16.98
  Bottom 0.203: U$65.1 U$65.2 64.26,17.25 63.62,16.61 61.79,16.61 61.42,16.98 61.28,16.98 U$68.P$1
  Bottom 0.254: U$65.1 64.22,18.5 63.32,19.41 63.32,20.93 62.45,21.79 v61.74,21.79 61.54,21.79 60.68,22.66 58.24,22.66 R14.2 R15.2
3.3V3  (via drill 0.2 pad 0.51)
  Top 0.14: C90.2 74.5,9.94 v74.53,9.96
  Top 0.152: C91.2 75.55,12.74 v75.55,12.64 | U$90.24 77.18,13.81 v76.97,13.61 | C90.2 74.5,10.38 74.63,10.52 74.63,10.93 C82.1 | LDO_VREG3.VOUT 78.68,11.64 v78.69,11.63 | U$90.30 78.75,18.29 v79,18.54
  Top 0.203: C80.2 70.87,20.93
  Top 0.254: 70.87,20.93 L3.1 70.14,20.8 v69.91,20.52 | R17.2 79.47,10.29 C72.1 79.09,11.23 v78.69,11.63
  Route2 0.254: v69.91,20.52 70.57,20.52 72.09,22.05 75.19,22.05 76.2,23.06 80.47,23.06 v81.74,21.79 | v77.68,10.46 77.68,11.33 77.93,11.58 78.64,11.58 v78.69,11.63
  Route15 0.203: v76.97,13.61 76.07,13.61 75.6,13.14 75.6,12.69 v75.55,12.64
  Route15 0.254: v81.74,21.79 81.74,21.74 82.1,21.39 82.1,19.46 81.13,18.49 79.05,18.49 v79,18.54
  Bottom 0.14: v74.53,9.96 74.53,8.7 U$71.P$1 | v75.55,12.64 C91.2
  Bottom 0.152: 75.14,9.96 76.41,9.96 76.86,10.41 77.63,10.41 v77.68,10.46 77.27,10.82 C75.1 | 75.14,9.96 v74.53,9.96 | 75.14,9.96 75.55,10.37 v75.55,12.64 74.83,13.36 74.22,13.36 73.77,13.82 73.77,14.17 73,14.94 73,16 73.72,16.71 75.49,16.71 75.9,16.31 75.9,15.39 76.31,14.98 U$92.P$13 | U$92.P$8 79.71,14.02 79.46,13.77 79.46,12.24 | 79.46,12.24 79.46,11.94 79.15,11.63 v78.69,11.63 | U$92.P$22 79.31,18.23 v79,18.54 | 79.46,12.24 79.91,12.7 80.62,12.7 81.34,13.41 81.34,16.93 81.28,16.98
  Bottom 0.203: U$89.1 U$89.2 84.26,17.25 83.62,16.61 81.79,16.61 81.42,16.98 81.28,16.98 U$92.P$1
  Bottom 0.254: U$89.1 84.22,18.5 83.32,19.41 83.32,20.93 82.45,21.79 v81.74,21.79 81.54,21.79 80.68,22.66 78.24,22.66 R19.2 R20.2
3.3V4  (via drill 0.2 pad 0.51)
  Top 0.14: C113.2 94.5,9.94 v94.53,9.96
  Top 0.152: C114.2 95.55,12.74 v95.55,12.64 | U$113.24 97.18,13.81 v96.97,13.61 | C113.2 94.5,10.38 94.63,10.52 94.63,10.93 C105.1 | LDO_VREG4.VOUT 98.68,11.64 v98.69,11.63 | U$113.30 98.75,18.29 v99,18.54
  Top 0.203: C103.2 90.87,20.93
  Top 0.254: 90.87,20.93 L4.1 90.14,20.8 v89.91,20.52 | R22.2 99.47,10.29 C95.1 99.09,11.23 v98.69,11.63
  Route2 0.254: v89.91,20.52 90.57,20.52 92.09,22.05 95.19,22.05 96.2,23.06 100.47,23.06 v101.74,21.79 | v97.68,10.46 97.68,11.33 97.93,11.58 98.64,11.58 v98.69,11.63
  Route15 0.203: v96.97,13.61 96.07,13.61 95.6,13.14 95.6,12.69 v95.55,12.64
  Route15 0.254: v101.74,21.79 101.74,21.74 102.1,21.39 102.1,19.46 101.13,18.49 99.05,18.49 v99,18.54
  Bottom 0.14: v94.53,9.96 94.53,8.7 U$95.P$1 | v95.55,12.64 C114.2
  Bottom 0.152: 95.14,9.96 96.41,9.96 96.86,10.41 97.63,10.41 v97.68,10.46 97.27,10.82 C98.1 | 95.14,9.96 v94.53,9.96 | 95.14,9.96 95.55,10.37 v95.55,12.64 94.83,13.36 94.22,13.36 93.77,13.82 93.77,14.17 93,14.94 93,16 93.72,16.71 95.49,16.71 95.9,16.31 95.9,15.39 96.31,14.98 U$115.P$13 | U$115.P$8 99.71,14.02 99.46,13.77 99.46,12.24 | 99.46,12.24 99.46,11.94 99.15,11.63 v98.69,11.63 | U$115.P$22 99.31,18.23 v99,18.54 | 99.46,12.24 99.91,12.7 100.62,12.7 101.34,13.41 101.34,16.93 101.28,16.98
  Bottom 0.203: U$112.1 U$112.2 104.26,17.25 103.62,16.61 101.79,16.61 101.42,16.98 101.28,16.98 U$115.P$1
  Bottom 0.254: U$112.1 104.22,18.5 103.32,19.41 103.32,20.93 102.45,21.79 v101.74,21.79 101.54,21.79 100.68,22.66 98.24,22.66 R24.2 R25.2
3.3V5  (via drill 0.2 pad 0.51)
  Top 0.14: C136.2 114.5,9.94 v114.53,9.96
  Top 0.152: C137.2 115.55,12.74 v115.55,12.64 | U$136.24 117.18,13.81 v116.97,13.61 | C136.2 114.5,10.38 114.63,10.52 114.63,10.93 C128.1 | LDO_VREG5.VOUT 118.68,11.64 v118.69,11.63 | U$136.30 118.75,18.29 v119,18.54
  Top 0.203: C126.2 110.87,20.93
  Top 0.254: 110.87,20.93 L5.1 110.14,20.8 v109.91,20.52 | R27.2 119.47,10.29 C118.1 119.09,11.23 v118.69,11.63
  Route2 0.254: v109.91,20.52 110.57,20.52 112.09,22.05 115.19,22.05 116.2,23.06 120.47,23.06 v121.74,21.79 | v117.68,10.46 117.68,11.33 117.93,11.58 118.64,11.58 v118.69,11.63
  Route15 0.203: v116.97,13.61 116.07,13.61 115.6,13.14 115.6,12.69 v115.55,12.64
  Route15 0.254: v121.74,21.79 121.74,21.74 122.1,21.39 122.1,19.46 121.13,18.49 119.05,18.49 v119,18.54
  Bottom 0.14: v114.53,9.96 114.53,8.7 U$118.P$1 | v115.55,12.64 C137.2
  Bottom 0.152: 115.14,9.96 116.41,9.96 116.86,10.41 117.63,10.41 v117.68,10.46 117.27,10.82 C121.1 | 115.14,9.96 v114.53,9.96 | 115.14,9.96 115.55,10.37 v115.55,12.64 114.83,13.36 114.22,13.36 113.77,13.82 113.77,14.17 113,14.94 113,16 113.72,16.71 115.49,16.71 115.9,16.31 115.9,15.39 116.31,14.98 U$138.P$13 | U$138.P$8 119.71,14.02 119.46,13.77 119.46,12.24 | 119.46,12.24 119.46,11.94 119.15,11.63 v118.69,11.63 | U$138.P$22 119.31,18.23 v119,18.54 | 119.46,12.24 119.91,12.7 120.62,12.7 121.34,13.41 121.34,16.93 121.28,16.98
  Bottom 0.203: U$135.1 U$135.2 124.26,17.25 123.62,16.61 121.79,16.61 121.42,16.98 121.28,16.98 U$138.P$1
  Bottom 0.254: U$135.1 124.22,18.5 123.32,19.41 123.32,20.93 122.45,21.79 v121.74,21.79 121.54,21.79 120.68,22.66 118.24,22.66 R29.2 R30.2
3.3V6  (via drill 0.2 pad 0.51)
  Top 0.14: C159.2 134.5,9.94 v134.53,9.96
  Top 0.152: C160.2 135.55,12.74 v135.55,12.64 | U$159.24 137.18,13.81 v136.97,13.61 | C159.2 134.5,10.38 134.63,10.52 134.63,10.93 C151.1 | LDO_VREG6.VOUT 138.68,11.64 v138.69,11.63 | U$159.30 138.75,18.29 v139,18.54
  Top 0.203: C149.2 130.87,20.93
  Top 0.254: 130.87,20.93 L7.1 130.14,20.8 v129.91,20.52 | R32.2 139.47,10.29 C141.1 139.09,11.23 v138.69,11.63
  Route2 0.254: v129.91,20.52 130.57,20.52 132.09,22.05 135.19,22.05 136.21,23.06 140.47,23.06 v141.74,21.79 | v137.68,10.46 137.68,11.33 137.93,11.58 138.64,11.58 v138.69,11.63
  Route15 0.203: v136.97,13.61 136.07,13.61 135.6,13.14 135.6,12.69 v135.55,12.64